# Altium PCB HW_Z-BAND_SMART_AMP_R1.PcbDoc (part 1 of 5)
Units mil, origin at the board's own origin, x right, y up, seen from the top; angles counter-clockwise.
Board outline 10200 x 3900 mil, 4 copper layers (Top Layer, Int1 (GND), Int2 (PWR), Bottom Layer), stack 60.134 mil thick; 398 components, 240 nets, 1098 pads, 2492 vias.
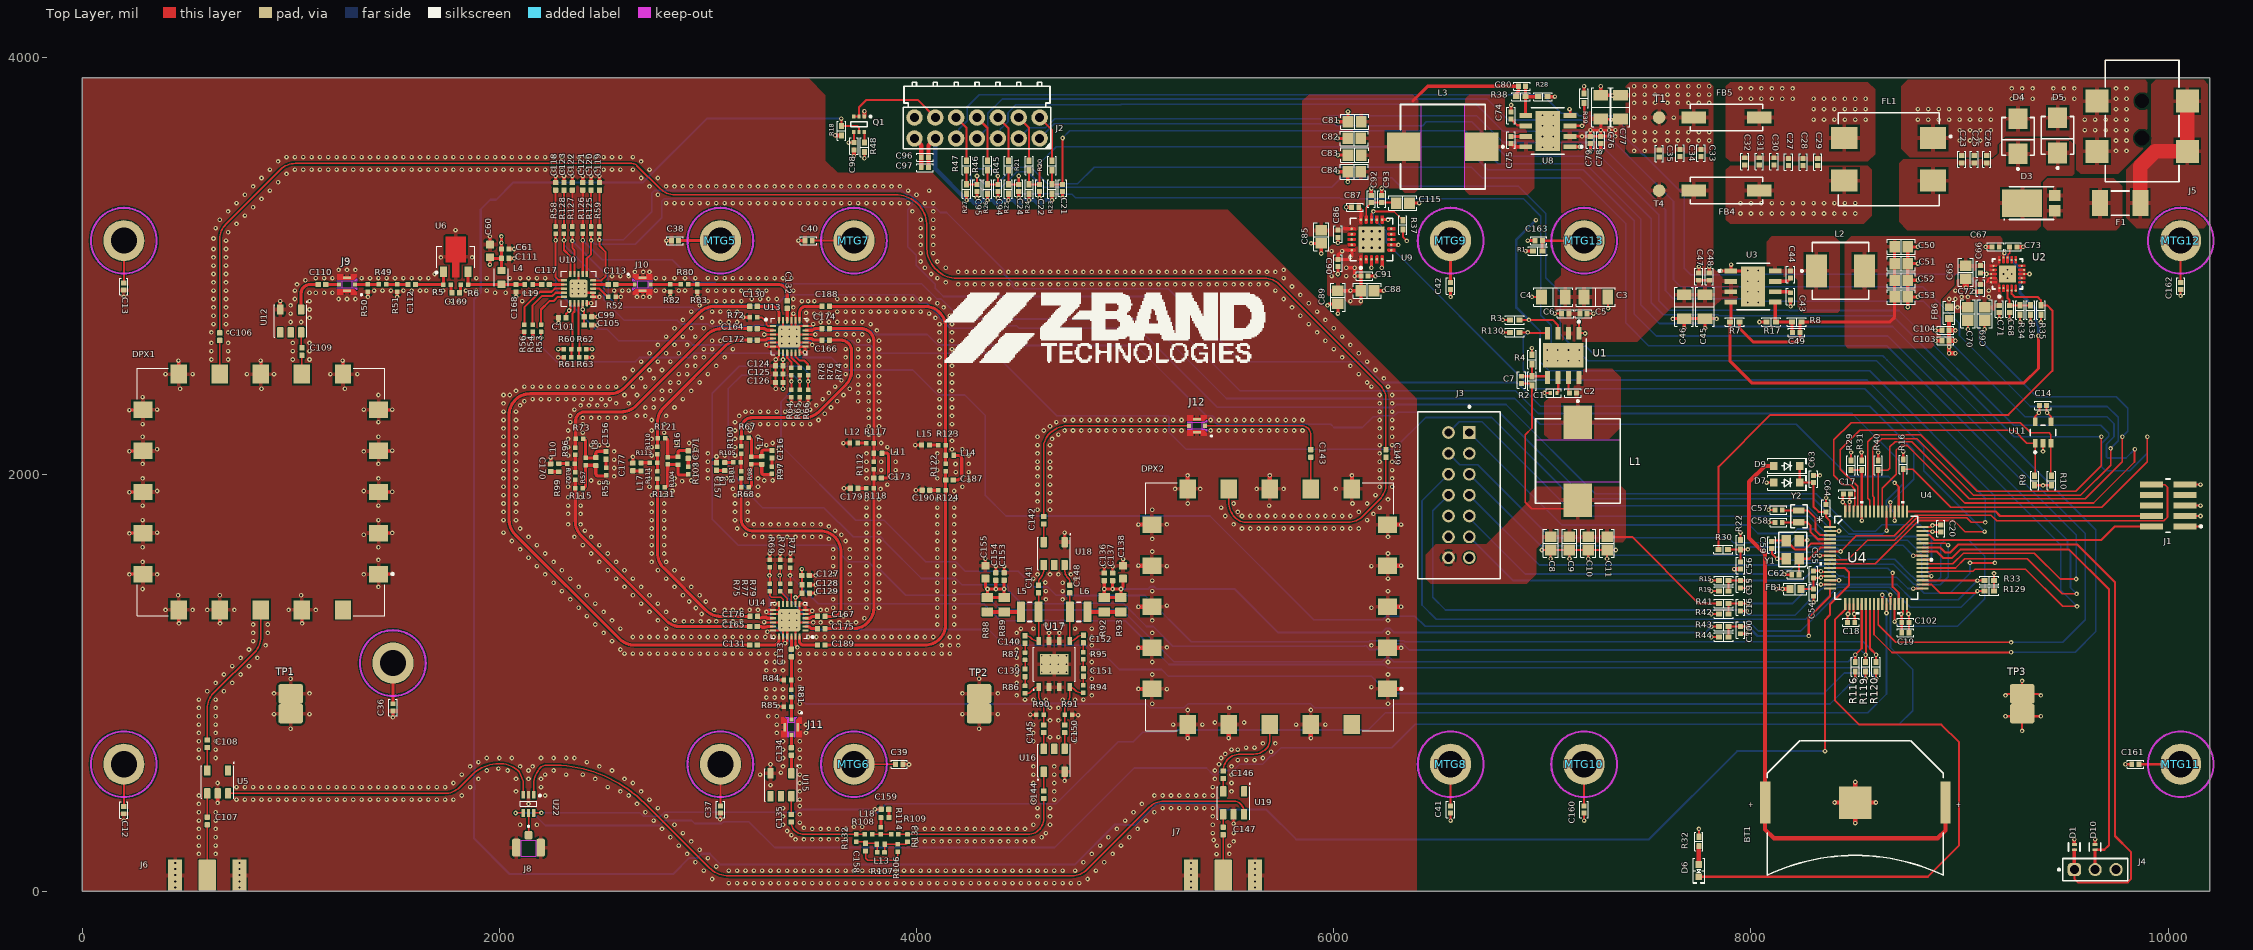
[diagram p0: Top Layer view]
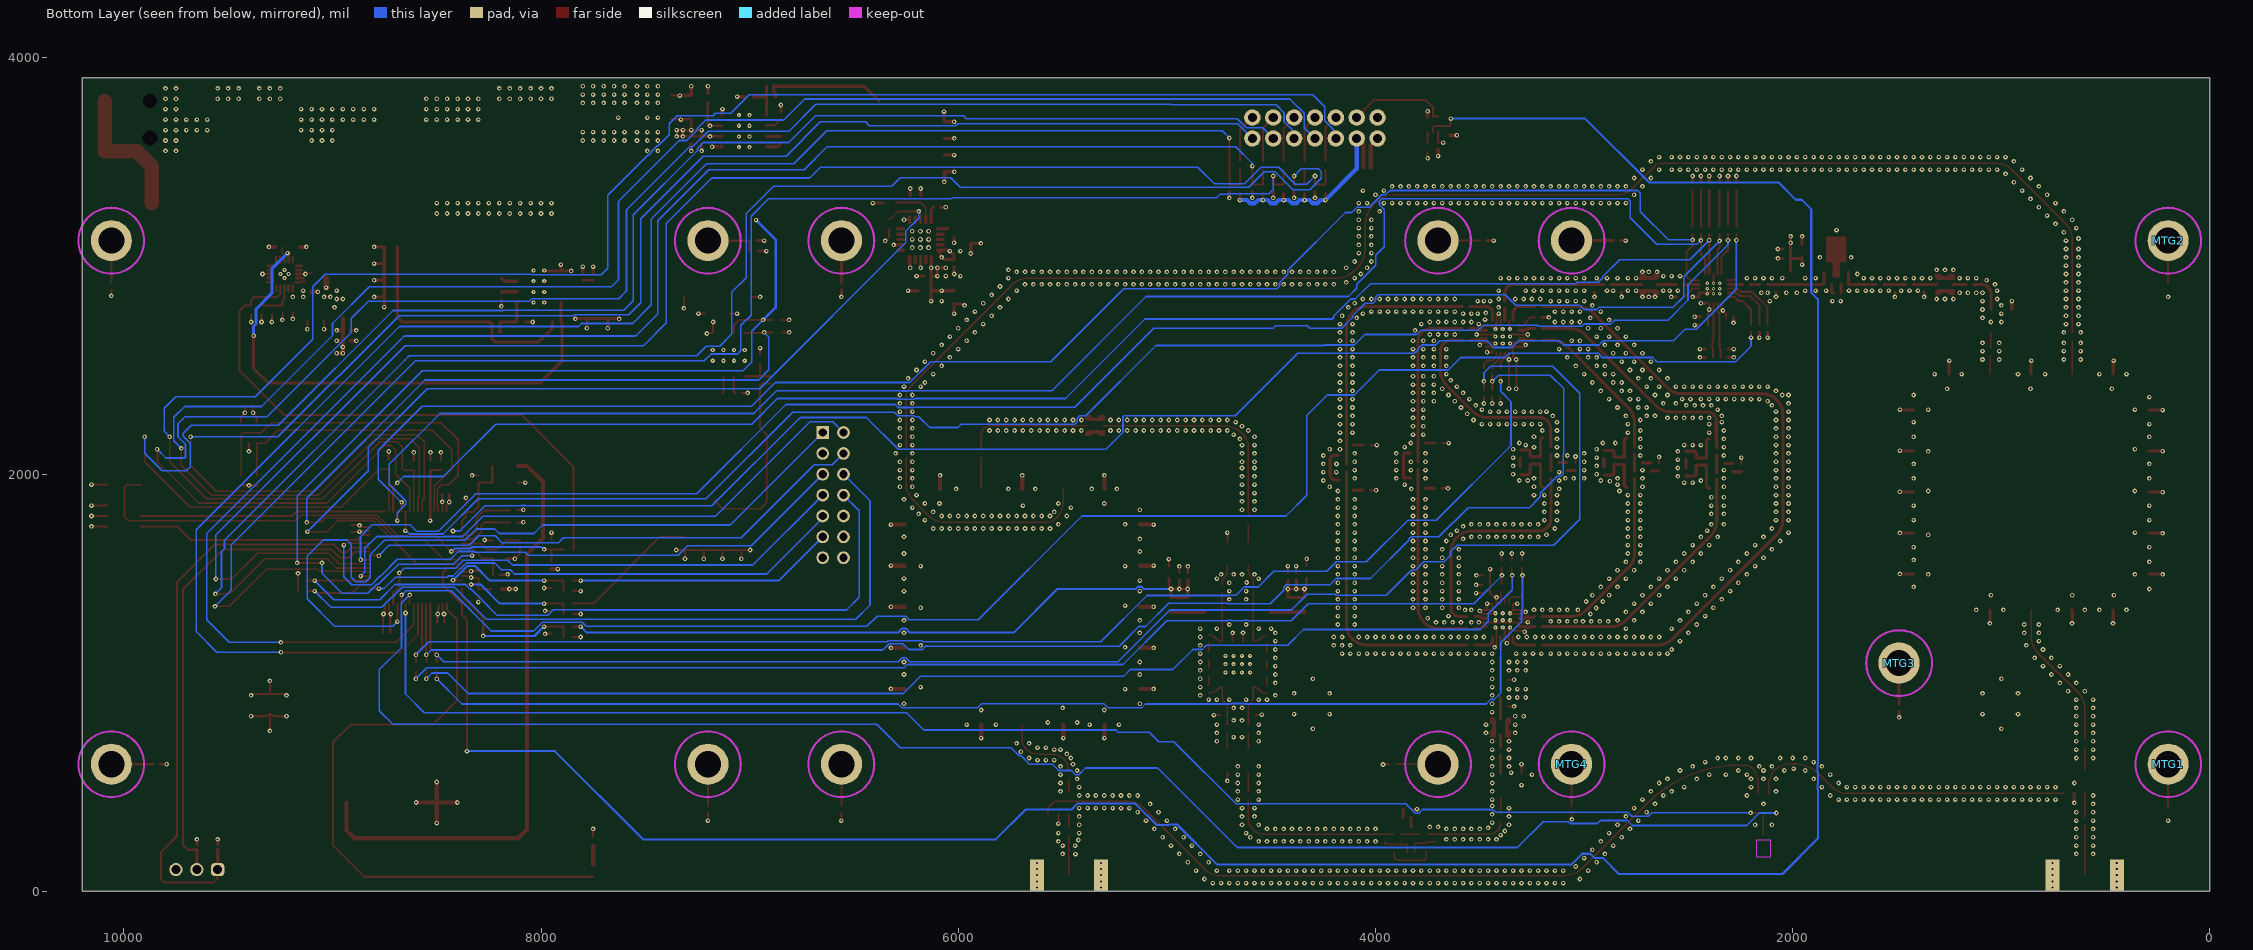
[diagram p1: Bottom Layer view, seen from below]
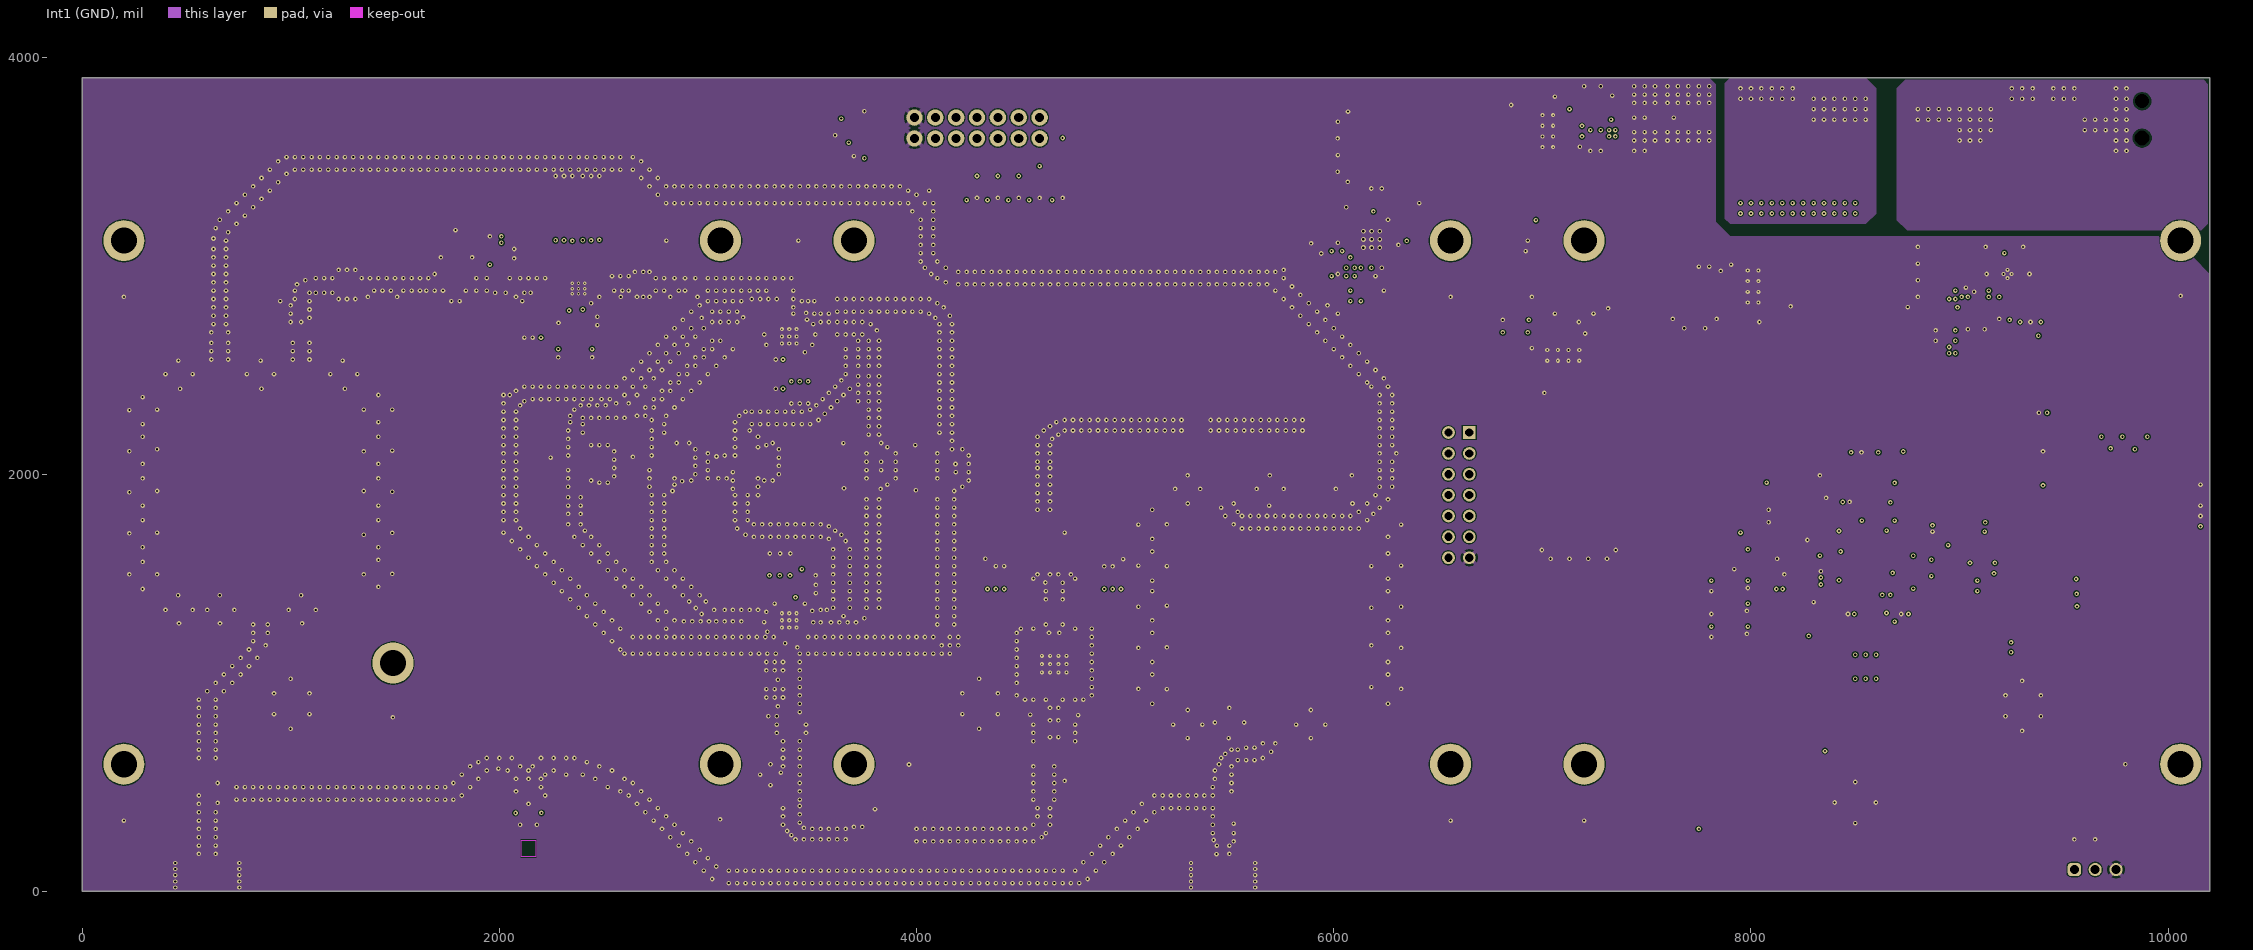
[diagram p2: Int1 (GND)]
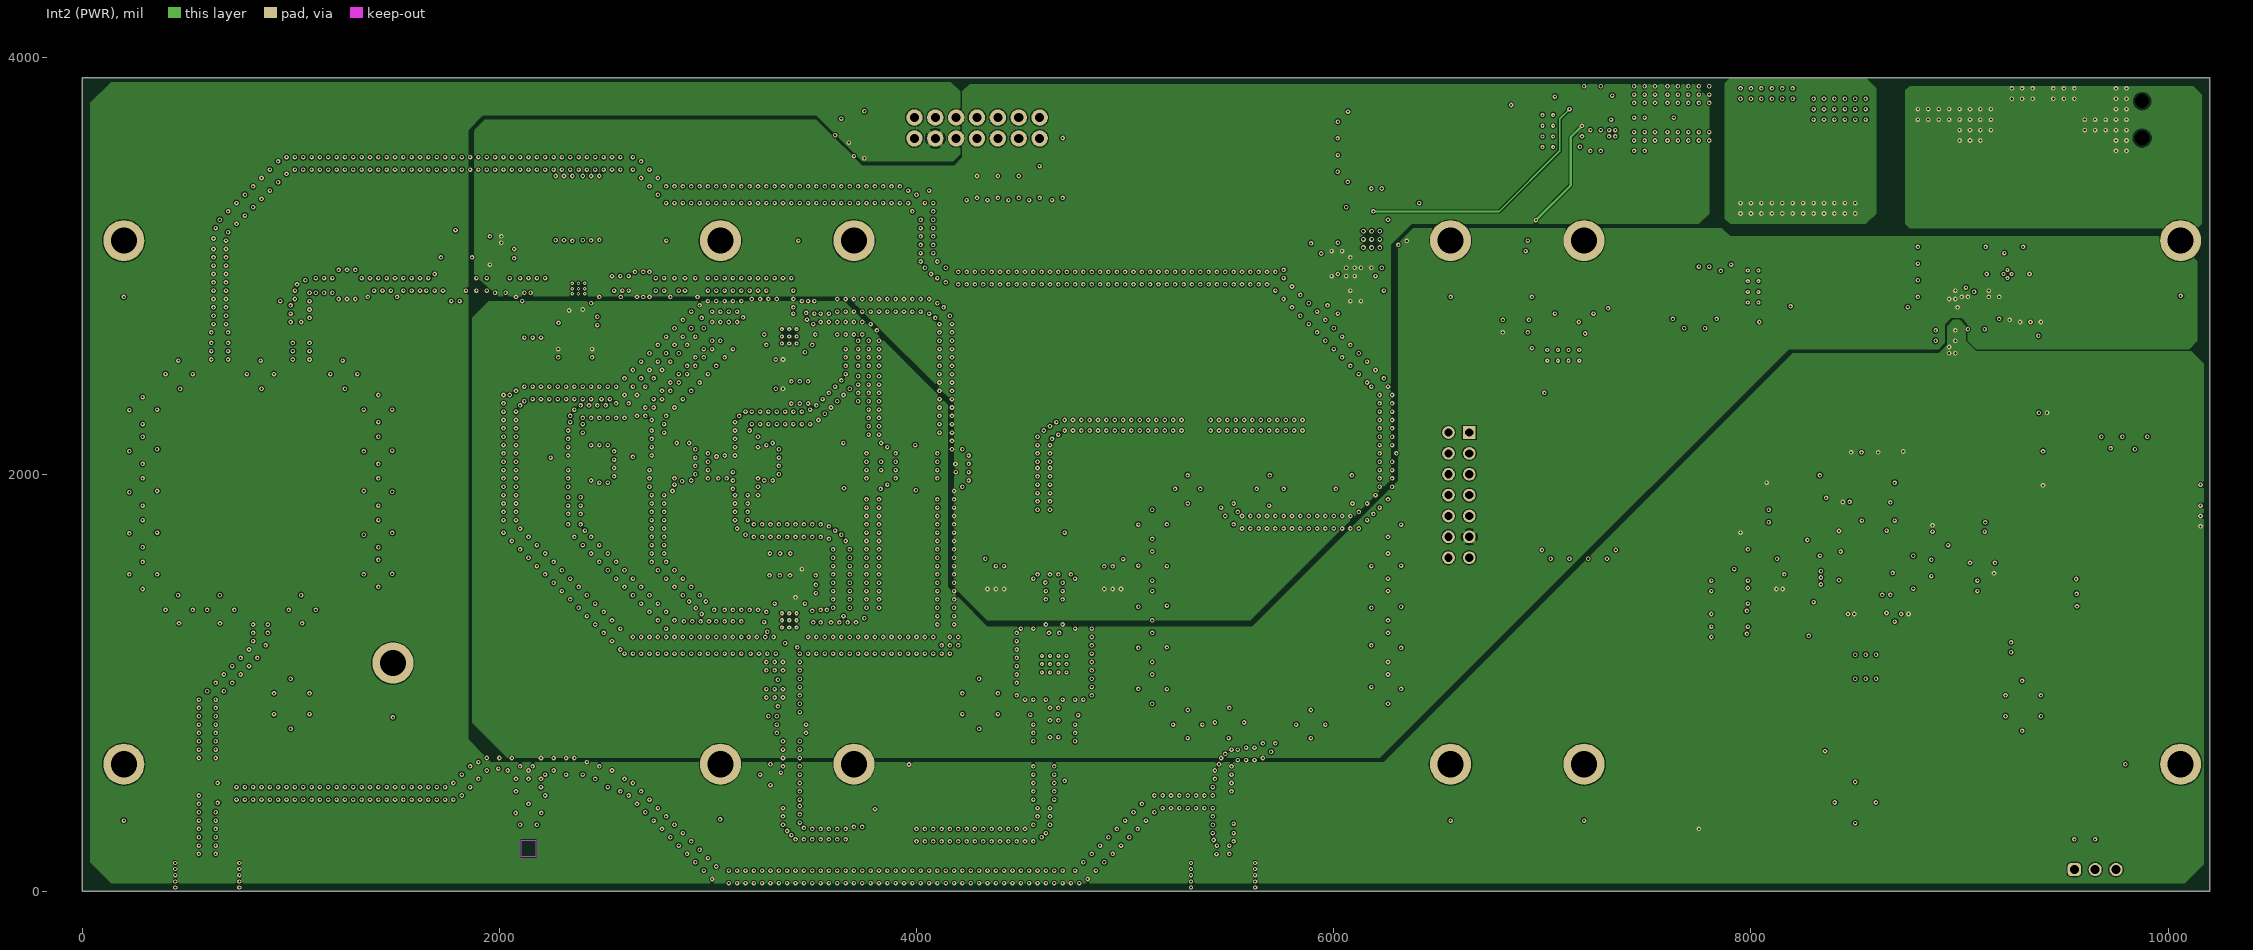
[diagram p3: Int2 (PWR)]

## Layer stack, top to bottom
Top Solder: solder mask 1, SM-001, Dk 3.5
Top Layer: signal copper 0.689
Dielectric 1: prepreg 16, PP-023, Dk 4.25
Int1 (GND): signal copper 1.378
Dielectric 2: core 24, Core-039, Dk 4.25
Int2 (PWR): signal copper 1.378
Dielectric 3: prepreg 16, PP-023, Dk 4.25
Bottom Layer: signal copper 0.689
Bottom Solder: solder mask 1, SM-001, Dk 3.5

## Board outline
0,0 10200,0 10200,3900 0,3900

## Design rules (kind name [scope] priority, off if disabled: settings)
Clearance Clearance_50ohm [InNetClass('RF_50_OHM')] p1: gap=5 ignorepadtopadclearanceinfootprint=TRUE except(10: Arc-Hole Track-Hole SMDPad-Hole THPad-Hole Via-Hole Fill-Hole Poly-Hole Region-Hole Text-Hole)
Clearance Clearance_75ohm [InNetClass('RF_75_OHM')] p2: gap=7 ignorepadtopadclearanceinfootprint=TRUE except(10: Arc-Hole Track-Hole SMDPad-Hole THPad-Hole Via-Hole Fill-Hole Poly-Hole Region-Hole Text-Hole)
Clearance [All] p3: gap=5 ignorepadtopadclearanceinfootprint=TRUE except(10: Arc-Hole Track-Hole SMDPad-Hole THPad-Hole Via-Hole Fill-Hole Poly-Hole Region-Hole Text-Hole)
DiffPairsRouting [All] p1: maxlimit=50.2 minlimit=5 mostfreqgap=11.47 toplayer_maxgap=5 toplayer_prefgap=5 toplayer_minwidth=10.52 toplayer_maxwidth=10.52 toplayer_prefwidth=10.52 bottomlayer_maxgap=5 bottomlayer_prefgap=5 bottomlayer_minwidth=10.52 bottomlayer_maxwidth=10.52 bottomlayer_prefwidth=10.52 impedanceprofiledriven=TRUE impedanceprofileid={E00AF46A-0802-41D7-B478-53C2EC012939} impedanceprofilevalue=90.000000 maxuncoupledlength=500
HoleSize [All] p1: absolutevalues=TRUE maxlimit=1000 minlimit=1 maxpercent=80.000 minpercent=20.000
MinimumAnnularRing [All] p1: minimumring=3.9
MinimumSolderMaskSliver [All] p1: minsoldermaskwidth=2
NetAntennae [All] p1: netantennaetolerance=20
PlaneClearance [All] p1: clearance=10
PlaneConnect [All] p1: pad.planeconnectstyle=Relief pad.reliefexpansion=20 pad.reliefentries=4 pad.reliefconductorwidth=20 pad.reliefairgap=10 via.planeconnectstyle=Direct via.reliefexpansion=20 via.reliefentries=4 via.reliefconductorwidth=10 via.reliefairgap=10
PolygonConnect [All] p1: thpad.connectstyle=Relief thpad.reliefconductorwidth=20 thpad.reliefentries=4 thpad.polygonreliefangle="45 Angle" thpad.airgapwidth=10 smdpad.connectstyle=Relief smdpad.reliefconductorwidth=20 smdpad.reliefentries=4 smdpad.polygonreliefangle="90 Angle" smdpad.airgapwidth=10 via.connectstyle=Direct via.reliefconductorwidth=10 via.reliefentries=4 via.polygonreliefangle="90 Angle" via.airgapwidth=10
RoutingVias [All] p1: holewidth=10 width=22 viastyle="Through Hole" minholewidth=8 minwidth=20 maxholewidth=80 maxwidth=80
SilkToSilkClearance [All] p1: silktosilkclearance=2
SilkToSolderMaskClearance [IsPad] p1: minsilkscreentomaskgap=2 clearancetoexposedcopper=TRUE
SolderMaskExpansion isVia [isvia] p1: expansion=4 istentingtop=TRUE
SolderMaskExpansion SolderMaskExpansion_default [All] p2: expansion=2 istentingtop=FALSE
SupplyNets "Schematic Supply Nets_14" [InNet('+3V3_D')] p1: voltage=0.000
SupplyNets "Schematic Supply Nets_13" [InNet('+3V3')] p2: voltage=0.000
SupplyNets "Schematic Supply Nets_12" [InNet('+9V')] p3: voltage=0.000
SupplyNets "Schematic Supply Nets_11" [InNet('GND_INT')] p4: voltage=0.000
SupplyNets "Schematic Supply Nets_10" [InNet('+8V')] p5: voltage=0.000
SupplyNets "Schematic Supply Nets_8" [InNet('GND_IN')] p6: voltage=0.000
SupplyNets "Schematic Supply Nets_7" [InNet('+5V')] p7: voltage=0.000
SupplyNets "Schematic Supply Nets_6" [InNet('+3V8')] p8: voltage=0.000
SupplyNets "Schematic Supply Nets_3" [InNet('MAIN_VDC_IN')] p9: voltage=0.000
SupplyNets "Schematic Supply Nets_2" [InNet('MAIN_VDC')] p10: voltage=0.000
SupplyNets "Schematic Supply Nets" [InNet('GND')] p11: voltage=0.000
UnRoutedNet [All] p1: checkbadconnections=TRUE
Width "Schematic Width Constraint_2" [InNet('NetC165_2')] p1: maxlimit=15 minlimit=10 preferedwidth=15 toplayer_minwidth=15 bottomlayer_minwidth=15 impedanceprofiledriven=TRUE impedanceprofileid={5CFBB01E-DCDC-40CB-8085-250B3334724C} impedanceprofilevalue=50.000000 minimp=50.000000 maximp=50.000000 favimp=50.000000
Width "Schematic Width Constraint_1" [InNet('NetC107_2')] p2: maxlimit=10 minlimit=6.81 preferedwidth=10 toplayer_maxwidth=6.81 toplayer_prefwidth=6.81 bottomlayer_maxwidth=6.81 bottomlayer_prefwidth=6.81 impedanceprofiledriven=TRUE impedanceprofileid={3DF160FF-8BF8-482F-8CC9-510EC21D1F20} impedanceprofilevalue=75.000000 minimp=50.000000 maximp=50.000000 favimp=50.000000
Width "Schematic Width Constraint" [InNet('NetC130_2')] p3: maxlimit=15 minlimit=10 preferedwidth=15 toplayer_minwidth=15 bottomlayer_minwidth=15 impedanceprofiledriven=TRUE impedanceprofileid={5CFBB01E-DCDC-40CB-8085-250B3334724C} impedanceprofilevalue=50.000000 minimp=50.000000 maximp=50.000000 favimp=50.000000
Width Width_50ohm_RF [InNetClass('RF_50_OHM')] p4: maxlimit=15 minlimit=8.25 preferedwidth=16.14 toplayer_minwidth=15 toplayer_prefwidth=15 bottomlayer_minwidth=15 bottomlayer_prefwidth=15 impedanceprofiledriven=TRUE impedanceprofileid={5CFBB01E-DCDC-40CB-8085-250B3334724C} impedanceprofilevalue=50.000000 minimp=50.000000 maximp=50.000000 favimp=50.000000
Width Width_75ohm_RF [InNetClass('RF_75_OHM')] p5: maxlimit=10 minlimit=6.81 preferedwidth=16.14 toplayer_maxwidth=6.81 toplayer_prefwidth=6.81 bottomlayer_maxwidth=6.81 bottomlayer_prefwidth=6.81 impedanceprofiledriven=TRUE impedanceprofileid={3DF160FF-8BF8-482F-8CC9-510EC21D1F20} impedanceprofilevalue=75.000000 minimp=50.000000 maximp=50.000000 favimp=50.000000
Width [All] p6: maxlimit=100 minlimit=6 preferedwidth=10 minimp=50.000000 maximp=50.000000 favimp=50.000000
21 further rules are at their usual default settings.

## Classes and differential pairs
net class RF_50_OHM: NetC110_1 NetC110_2 NetC112_1 NetC112_2 NetC113_1 NetC113_2 NetC116_1 NetC116_2 NetC117_1 NetC117_2 NetC130_1 NetC130_2 NetC131_1 NetC132_1 NetC132_2 NetC133_1 NetC133_2 NetC134_1 NetC134_2 NetC156_1 NetC156_2 NetC164_1 NetC165_2 NetC166_1 NetC167_2 NetC168_2 NetC169_1 NetC169_2 NetC171_1 NetC172_1 NetC173_1 NetC173_2 NetC174_1 NetC174_2 NetC175_2 NetC176_1 NetC176_2 NetC187_1 NetC187_2 NetC188_1 NetC188_2 NetC189_2 NetJ9_C NetJ10_A NetJ11_C NetL7_2 NetL8_2 NetL16_2 NetR96_2 NetR100_2 NetR110_2
net class RF_75_OHM: bypass_lane NetC106_1 NetC107_1 NetC107_2 NetC108_1 NetC108_2 NetC109_1 NetC109_2 NetC135_1 NetC135_2 NetC140_2 NetC141_1 NetC142_1 NetC142_2 NetC143_1 NetC143_2 NetC144_1 NetC144_2 NetC145_1 NetC145_2 NetC146_1 NetC146_2 NetC147_1 NetC147_2 NetC148_1 NetC148_2 NetC149_1 NetC150_1 NetC150_2 NetC158_1 NetC158_2 NetJ8_1 NetL13_2 NetR108_2 NetU5_1 NetU19_1
component class 10_RF_2: C116 C156 C157 C164 C165 C166 C167 C170 C171 C172 C173 C174 C175 C176 C177 C179 C187 C188 C189 C190 J8 L7 L8 L9 L10 L11 L12 L14 L15 L16 L17 R55 R57 R67 R68 R73 R96 R97 R98 R99 R100 R101 R102 R103 R104 R105 R110 R111 R112 R113 R115 R117 R118 R121 R122 R123 R124 R131 U22
component class 10_RF_1: C60 C61 C99 C101 C105 C106 C107 C108 C109 C110 C111 C112 C113 C117 C118 C119 C120 C121 C122 C123 C124 C125 C126 C127 C128 C129 C130 C131 C132 C133 C134 C135 C136 C137 C138 C139 C140 C141 C142 C143 C144 C145 C146 C147 C148 C149 C150 C151 C152 C153 C154 C155 C158 C159 C168 C169 DPX1 DPX2 J6 J7 J9 J10 J11 J12 L4 L5 L6 L13 L18 L19 R5 R6 R49 R50 R51 R52 R53 R54 R56 R58 R59 R60 R61 R62 R63 R64 R65 R66 R69 R70 R71 R72 R74 R75 R76 R77 R78 R79 R80 R81 R82 R83 R84 R85 R86 R87 R88 R89 R90 R91 R92 R93 R94 R95 R106 R107 R108 R109 R114 R125 R126 R127 R128 R132 R133 U5 U6 U10 U12 U13 U14 U15 U16 U17 U18 U19
component class 04_8V_GENERATION: C74 C75 C76 C77 C78 C79 C80 C81 C82 C83 C84 C85 C86 C87 C88 C89 C90 C91 C92 C93 C115 L3 R28 R37 R38 R39 U8 U9
component class 06_MCU: BT1 C15 C16 C17 C18 C19 C20 C54 C55 C56 C57 C58 C59 C62 C63 C64 C100 C102 D6 D7 D9 FB1 J1 R15 R19 R22 R29 R30 R31 R32 R41 R42 R43 R44 R116 R119 R120 U4 Y1 Y2
component class 09_USB: D1 D10 J4
component class 08_EPROM_UNIQUE_SERIAL: C14 R9 R10 U11
component class 07_CONNECTORS: C12 C13 C36 C37 C38 C39 C40 C41 C42 C160 C161 C162 C163 J3 MTG1 MTG2 MTG3 MTG4 MTG5 MTG6 MTG7 MTG8 MTG9 MTG10 MTG11 MTG12 MTG13 R1 R33 R129
component class 05_3V3_GENERATION: C43 C44 C45 C46 C47 C48 C49 C50 C51 C52 C53 C65 C66 C67 C68 C69 C70 C71 C72 C73 C103 C104 FB6 L2 R7 R8 R17 R34 R35 R36 U2 U3
component class 11_SCREEN: C21 C22 C24 C94 C95 C96 C97 C98 J2 Q1 R16 R18 R20 R21 R23 R24 R25 R26 R27 R40 R45 R46 R47 R48
component class 03_POWER: C1 C2 C3 C4 C5 C6 C7 C8 C9 C10 C11 C23 C25 C26 C27 C28 C29 C30 C31 C32 C33 C34 C35 D3 D4 D5 F1 FB4 FB5 FL1 J5 L1 R2 R3 R4 R130 T1 T4 TP1 TP2 TP3 U1

## Components (designator, comment, footprint, x,y, rotation, side; value= is the part's Value field where it differs from the comment)
BT1 "3034" FP-3034-MFG 8500,400 r180 top locked
C1 "1 µF" "MURATA GRM155 0402_1005" 7054.25,2390 r180 top
C2 "0.1 µF" "CAP 0402_1005" 7147.32,2390 r180 top
C3 "10 µF" "CAP 1206_3216 - 0.8MM" 7257.09,2850 r180 top
C4 "10 µF" "CAP 1206_3216 - 0.8MM" 7052.91,2850 r0 top
C5 "0.1 µF" "CAP 0402_1005" 7197.32,2770 r180 top
C6 "0.1 µF" "CAP 0402_1005" 7110,2770 r0 top
C7 "1000 pF" "CAP 0402_1005" 6900,2452.68 r270 top
C8 "22 µF" "CAP 0805_2012" 7040,1668.5 r90 top
C9 "22 µF" "CAP 0805_2012" 7130,1668.5 r90 top
C10 "22 µF" "CAP 0805_2012" 7220,1668.5 r90 top
C11 "22 µF" "CAP 0805_2012" 7310,1668.5 r90 top
C12 "1000 pF" "CAP 0402_1005" 200,390 r90 top
C13 "1000 pF" "CAP 0402_1005" 200,2900 r90 top
C14 "0.1 µF" "CAP 0402_1005" 9400,2330 r0 top
C15 "0.1 µF" "CAP 0402_1005" 7950,1472.68 r90 top
C16 "0.1 µF" "CAP 0402_1005" 7950,1362.68 r90 top
C17 "1 µF" "CAP 0402_1005" 8460,1905 r0 top
C18 "0.1 µF" "CAP 0402_1005" 8480,1290 r0 top
C19 "0.1 µF" "CAP 0402_1005" 8740,1240 r0 top
C20 "0.1 µF" "CAP 0402_1005" 8910,1740 r90 top
C21 "0.1 µF" "CAP 0402_1005" 4700,3372.68 r90 top
C22 "0.1 µF" "CAP 0402_1005" 4590,3372.68 r90 top
C23 "0.1 µF" "CAP 0402_1005" 9010,3510 r270 top
C24 "0.1 µF" "CAP 0402_1005" 4490,3372.68 r90 top
C25 "1000 pF" "CAP 0402_1005" 9070,3510 r270 top
C26 "100 pF" "CAP 0402_1005" 9130,3510 r270 top
C27 "0.1 µF" "CAP 0402_1005" 8180,3497.32 r270 top
C28 "1000 pF" "CAP 0402_1005" 8250,3497.32 r270 top
C29 "100 pF" "CAP 0402_1005" 8320,3497.32 r270 top
C30 "0.1 µF" "CAP 0402_1005" 8110,3500 r270 top
C31 "1000 pF" "CAP 0402_1005" 8040,3500 r270 top
C32 "100 pF" "CAP 0402_1005" 7970,3500 r270 top
C33 "0.1 µF" "CAP 0402_1005" 7760,3540 r270 top
C34 "1000 pF" "CAP 0402_1005" 7660,3540 r270 top
C35 "100 pF" "CAP 0402_1005" 7560,3537.32 r270 top
C36 "1000 pF" "CAP 0402_1005" 1490,882.68 r90 top
C37 "1000 pF" "CAP 0402_1005" 3060,392.68 r90 top
C38 "1000 pF" "CAP 0402_1005" 2842.68,3120 r0 top
C39 "1000 pF" "CAP 0402_1005" 3917.32,610 r180 top
C40 "1000 pF" "CAP 0402_1005" 3482.68,3120 r0 top
C41 "1000 pF" "CAP 0402_1005" 6560,392.68 r90 top
C42 "1000 pF" "CAP 0402_1005" 6560,2902.68 r90 top
C43 "1 µF" "CAP 0402_1005" 8190,2852.68 r270 top
C44 "0.1 µF" "CAP 0402_1005" 8190,2957.32 r270 top
C45 "10 µF" "CAP 1206_3216 - 0.8MM" 7780,2802.91 r90 top
C46 "10 µF" "CAP 1206_3216 - 0.8MM" 7680,2802.91 r90 top
C47 "0.1 µF" "CAP 0402_1005" 7750,2947.32 r270 top
C48 "0.1 µF" "CAP 0402_1005" 7800,2947.32 r270 top
C49 "1000 pF" "CAP 0402_1005" 8217.32,2680 r0 top
C50 "22 µF" "CAP 0805_2012" 8720,3090 r180 top
C51 "22 µF" "CAP 0805_2012" 8720,3010 r180 top
C52 "22 µF" "CAP 0805_2012" 8720,2930 r180 top
C53 "22 µF" "CAP 0805_2012" 8720,2850 r180 top
C54 "0.1 µF" "CAP 0402_1005" 8300,1432.68 r90 top
C55 "10000 pF" "CAP 0402_1005" 8300,1520 r270 top
C56 "0.1 µF" "CAP 0402_1005" 7950,1562.68 r90 top
C57 "15 pF" "CAP 0402_1005" 8132.68,1828.54 r180 top
C58 "15 pF" "CAP 0402_1005" 8132.68,1768.54 r180 top
C59 "15 pF" "CAP 0402_1005" 8100,1661.22 r270 top
C60 "C 0603 16V X7R - 4.7uF" CAP_0603_N 1955,3070.51 r270 top value=4.7uF
C61 "C 0402 50V X7R - 100nF" CAP_0402_N 2028.11,3080 r180 top value=100nF
C62 "15 pF" "CAP 0402_1005" 8212.68,1518.54 r180 top
C63 "0.1 µF" "CAP 0402_1005" 8300,1977.32 r270 top
C64 "0.1 µF" "CAP 0402_1005" 8360,1837.32 r270 top
C65 "22 µF" "CAP 0805_2012" 9030,2968.5 r90 top
C66 "0.1 µF" "CAP 0402_1005" 9100,2982.68 r90 top
C67 "1000 pF" "CAP 0402_1005" 9172.68,3090 r0 top
C68 "10000 pF" "CAP 0402_1005" 9240,2792.68 r270 top
C69 "22 µF" "CAP 0805_2012" 9120,2768.5 r90 top
C70 "22 µF" "CAP 0805_2012" 9040,2768.5 r90 top
C71 "1 µF" "CAP 0402_1005" 9190,2792.68 r270 top
C72 "0.1 µF" "CAP 0402_1005" 9100,2892.68 r90 top
C73 "0.1 µF" "CAP 0402_1005" 9257.32,3090 r180 top
C74 "1 µF" "CAP 0402_1005" 6850,3720 r90 top
C75 "0.1 µF" "CAP 0402_1005" 6850,3602.68 r90 top
C76 "10 µF" "CAP 1206_3216 - 0.8MM" 7280,3760 r270 top
C77 "10 µF" "CAP 1206_3216 - 0.8MM" 7375,3760 r270 top
C78 "0.1 µF" "CAP 0402_1005" 7280,3602.68 r90 top
C79 "0.1 µF" "CAP 0402_1005" 7230,3602.68 r90 top
C80 "1000 pF" "CAP 0402_1005" 6902.68,3860 r180 top
C81 "22 µF" "CAP 0805_2012" 6100,3690 r0 top
C82 "22 µF" "CAP 0805_2012" 6098.5,3610 r0 top
C83 "22 µF" "CAP 0805_2012" 6100,3530 r0 top
C84 "22 µF" "CAP 0805_2012" 6098.5,3450 r0 top
C85 "22 µF" "CAP 0805_2012" 5940,3138.5 r90 top
C86 "0.1 µF" "CAP 0402_1005" 6020,3152.68 r90 top
C87 "1000 pF" "CAP 0402_1005" 6102.68,3280 r0 top
C88 "22 µF" "CAP 0805_2012" 6161.5,2880 r180 top
C89 "22 µF" "CAP 0805_2012" 6020,2848.5 r90 top
C90 "1 µF" "CAP 0402_1005" 6020,3012.68 r270 top
C91 "0.1 µF" "CAP 0402_1005" 6147.32,2950 r180 top
C92 "0.1 µF" "CAP 0402_1005" 6180,3320 r270 top
C93 "10000 pF" "CAP 0402_1005" 6230,3320 r270 top
C94 "0.1 µF" "CAP 0402_1005" 4390,3372.68 r90 top
C95 "0.1 µF" "CAP 0402_1005" 4290,3372.68 r90 top
C96 "1 µF" "CAP 0402_1005" 4040,3520 r180 top
C97 "0.1 µF" "CAP 0402_1005" 4040,3470 r0 top
C98 "0.1 µF" "CAP 0402_1005" 3700,3572.68 r90 top
C99 "C 0402 50V NP0 - 100pF" CAP_0402_N 2425,2755 r180 top value=100pF
C100 "0.1 µF" "CAP 0402_1005" 7950,1252.68 r90 top
C101 "C 0402 50V X7R - 100nF" CAP_0402_N 2301.89,2750 r0 top value=100nF
C102 "10000 pF" "CAP 0402_1005" 8740,1290 r0 top
C103 "0.1 µF" "CAP 0402_1005" 8932.68,2640 r0 top
C104 "10000 pF" "CAP 0402_1005" 8932.68,2690 r0 top
C105 "C 0402 50V X7R - 100nF" CAP_0402_N 2425,2715 r180 top value=100nF
C106 "C 0402 50V X7R - 10nF" CAP_0402_N 660,2660 r90 top value=10nF
C107 "C 0402 50V X7R - 10nF" CAP_0402_N 600,338.11 r90 top value=10nF
C108 "C 0402 50V X7R - 10nF" CAP_0402_N 600,708.11 r90 top value=10nF
C109 "C 0402 50V X7R - 10nF" CAP_0402_N 1053.7,2588.11 r90 top value=10nF
C110 "C 0402 50V X7R - 10nF" CAP_0402_N 1150,2910 r0 top value=10nF
C111 "C 0402 50V X7R - 1nF" CAP_0402_N 2028.11,3035 r180 top value=1nF
C112 "C 0402 50V X7R - 1nF" CAP_0402_N 1580,2910 r0 top value=1nF
C113 "C 0402 50V X7R - 10nF" CAP_0402_N 2540,2910 r0 top value=10nF
C115 "1 µF" "CAP 0805_2012" 6331.5,3300 r180 top
C116 "C 0402 50V X7R - 3.3nF" CAP_0402_N 3307.09,2096.06 r270 top value=3.3nF
C117 "C 0402 50V X7R - 1nF" CAP_0402_N 2221.89,2910 r0 top value=1nF
C118 "C 0402 50V NP0 - 100pF" CAP_0402_N 2270,3380 r270 top value=100pF
C119 "C 0402 50V NP0 - 100pF" CAP_0402_N 2480,3380 r270 top value=100pF
C120 "C 0402 50V NP0 - 100pF" CAP_0402_N 2440,3380 r270 top value=100pF
C121 "C 0402 50V NP0 - 100pF" CAP_0402_N 2400,3380 r270 top value=100pF
C122 "C 0402 50V NP0 - 100pF" CAP_0402_N 2350,3380 r270 top value=100pF
C123 "C 0402 50V NP0 - 100pF" CAP_0402_N 2310,3380 r270 top value=100pF
C124 "C 0402 50V NP0 - 100pF" CAP_0402_N 3341.89,2520.63 r0 top value=100pF
C125 "C 0402 50V X7R - 100nF" CAP_0402_N 3341.89,2480.63 r0 top value=100nF
C126 "C 0402 50V X7R - 100nF" CAP_0402_N 3341.89,2440 r0 top value=100nF
C127 "C 0402 50V X7R - 100nF" CAP_0402_N 3468.11,1515 r180 top value=100nF
C128 "C 0402 50V X7R - 100nF" CAP_0402_N 3469.37,1470.16 r180 top value=100nF
C129 "C 0402 50V NP0 - 100pF" CAP_0402_N 3469.37,1430.16 r180 top value=100pF
C130 "C 0402 50V X7R - 10nF" CAP_0402_N 3218.5,2805.12 r180 top value=10nF
C131 "C 0402 50V X7R - 10nF" CAP_0402_N 3218.5,1181.1 r180 top value=10nF
C132 "C 0402 50V X7R - 10nF" CAP_0402_N 3380.16,2813.39 r270 top value=10nF
C133 "C 0402 50V X7R - 10nF" CAP_0402_N 3399.84,1143.31 r270 top value=10nF
C134 "C 0402 50V X7R - 10nF" CAP_0402_N 3399.84,671.26 r270 top value=10nF
C135 "C 0402 50V X7R - 10nF" CAP_0402_N 3399.84,351.26 r270 top value=10nF
C136 "C 0402 50V X7R - 100nF" CAP_0402_N 4900,1508.11 r270 top value=100nF
C137 "C 0402 50V X7R - 10nF" CAP_0402_N 4940,1508.11 r90 top value=10nF
C138 "C 0603 16V X7R - 4.7uF" CAP_0603_N 4990,1530.51 r90 top value=4.7uF
C139 "C 0402 50V X7R - 10nF" CAP_0402_N 4520,1048.11 r90 top value=10nF
C140 "C 0402 50V X7R - 10nF" CAP_0402_N 4520,1208.11 r90 top value=10nF
C141 "C 0402 50V X7R - 10nF" CAP_0402_N 4585,1450 r270 top value=10nF
C142 "C 0402 50V X7R - 10nF" CAP_0402_N 4610,1780 r270 top value=10nF
C143 "C 0402 50V X7R - 10nF" CAP_0402_N 5890,2100 r90 top value=10nF
C144 "C 0402 50V X7R - 10nF" CAP_0402_N 4610,463.58 r90 top value=10nF
C145 "C 0402 50V X7R - 10nF" CAP_0402_N 4610,780 r90 top value=10nF
C146 "C 0402 50V X7R - 10nF" CAP_0402_N 5470,560 r90 top value=10nF
C147 "C 0402 50V X7R - 10nF" CAP_0402_N 5470,290 r90 top value=10nF
C148 "C 0402 50V X7R - 10nF" CAP_0402_N 4735,1450 r270 top value=10nF
C149 "C 0402 50V X7R - 10nF" CAP_0402_N 6250,2100 r90 top value=10nF
C150 "C 0402 50V X7R - 10nF" CAP_0402_N 4710,780 r90 top value=10nF
C151 "C 0402 50V X7R - 10nF" CAP_0402_N 4800,1050 r90 top value=10nF
C152 "C 0402 50V X7R - 10nF" CAP_0402_N 4800,1210 r90 top value=10nF
C153 "C 0402 50V X7R - 100nF" CAP_0402_N 4420,1510 r90 top value=100nF
C154 "C 0402 50V X7R - 10nF" CAP_0402_N 4380,1510 r270 top value=10nF
C155 "C 0603 16V X7R - 4.7uF" CAP_0603_N 4330,1530.51 r90 top value=4.7uF
C156 "C 0402 50V X7R - 3.3nF" CAP_0402_N 2511.81,2090.55 r270 top value=3.3nF
C157 "C 0402 50V C0G/NP0 - 5pF" CAP_0402_N 3041.34,2037.01 r270 top value=5pF
C158 "C 0402 50V X7R - 3.3nF" CAP_0402_N 3755.91,212.6 r270 top value=3.3nF
C159 "C 0402 50V C0G/NP0 - 5pF" CAP_0402_N 3848.43,393.7 r0 top value=5pF
C160 "1000 pF" "CAP 0402_1005" 7200,392.68 r90 top
C161 "1000 pF" "CAP 0402_1005" 9842.68,610 r0 top
C162 "1000 pF" "CAP 0402_1005" 10060,2902.68 r90 top
C163 "1000 pF" "CAP 0402_1005" 6982.68,3120 r0 top
C164 "C 0402 50V X7R - 10nF" CAP_0402_N 3218.5,2698.03 r180 top value=10nF
C165 "C 0402 50V X7R - 10nF" CAP_0402_N 3218.5,1269.68 r0 top value=10nF
C166 "C 0402 50V X7R - 10nF" CAP_0402_N 3564.57,2642.91 r0 top
C167 "C 0402 50V X7R - 10nF" CAP_0402_N 3543.31,1318.9 r180 top value=10nF
C168 "C 0402 50V C0G/NP0 - 0.5pF" CAP_0402_N 2080,2891.89 r90 top value=0.5pF
C169 "C 0402 50V C0G/NP0 - 20pF" CAP_0402_N 1791.34,2870.08 r0 top value=20pF
C170 "C 0402 50V C0G/NP0 - 5pF" CAP_0402_N 2246.06,2031.5 r270 top value=5pF
C171 "C 0402 50V X7R - 3.3nF" CAP_0402_N 2905.83,2094.41 r270 top value=3.3nF
C172 "C 0402 50V X7R - 10nF" CAP_0402_N 3218.5,2642.91 r180 top value=10nF
C173 "C 0402 50V X7R - 3.3nF" CAP_0402_N 3813.39,1982.28 r0 top value=3.3nF
C174 "C 0402 50V X7R - 10nF" CAP_0402_N 3564.57,2698.03 r0 top value=10nF
C175 "C 0402 50V X7R - 10nF" CAP_0402_N 3543.31,1259.84 r180 top value=10nF
C176 "C 0402 50V X7R - 10nF" CAP_0402_N 3220.08,1318.9 r0 top value=10nF
C177 "C 0402 50V C0G/NP0 - 5pF" CAP_0402_N 2640.08,2035.35 r270 top value=5pF
C179 "C 0402 50V X7R - 3.3nF" CAP_0402_N 3700.79,1933.07 r0 top value=3.3nF
C187 "C 0402 50V X7R - 3.3nF" CAP_0402_N 4157.8,1972.6 r0 top value=3.3nF
C188 "C 0402 50V X7R - 10nF" CAP_0402_N 3564.57,2805.12 r0 top value=10nF
C189 "C 0402 50V X7R - 10nF" CAP_0402_N 3543.31,1181.1 r180 top value=10nF
C190 "C 0402 50V X7R - 3.3nF" CAP_0402_N 4045.2,1923.39 r0 top value=3.3nF
D1 "RF2945-000" FP-SESD0402-MFG 9550,212.8 r270 top value=0.1pF
D3 "SDT8A60VP5-13" "DIODES INC SDT10A45P5" 9344.09,3300 r0 top
D4 "SMBJ14A" FP-SMBJ-MFG 9280,3620 r90 top
D5 "SMBJ14A" FP-SMBJ-MFG 9470,3624.65 r90 top
D6 "Green" "LED 0603_1608 GREEN" 7750,100 r270 top
D7 "MBR0520LT1G" SOD-123 8172.01,1960 r0 top
D9 "MBR0520LT1G" SOD-123 8172.01,2040 r0 top
D10 "RF2945-000" FP-SESD0402-MFG 9650,212.8 r270 top value=0.1pF
DPX1 "DPLX-4254A0+" NU-1620 856.85,1914.96 r180 top
DPX2 "DPLX-4254A0+" NU-1620 5693.15,1365.04 r180 top
F1 "0451003.MRL" FP-0451-MFG 9770,3300 r180 top value=0.0227Ω
FB1 "100 Ohms @ 100 MHz" "FER 0603_1608" 8213.43,1450 r180 top
FB4 "7427931" WE-PBF_8530_L9.5W3H3.1 7882.52,3360 r180 top
FB5 "7427931" WE-PBF_8530_L9.5W3H3.1 7882.52,3710 r180 top
FB6 "100 Ohms @ 100 MHz" "FER 0603_1608" 8950,2773.43 r90 top
FL1 "ACM1211-701-2PL-TL01" TDK-ACM1211-4_V 8660,3510 r180 top
J1 "FTSH-105-01-F-DV-K-P-TR" FP-FTSH-105-01-F-DV-K-P-T-MFG 10000,1850 r90 top
J2 "M20-9740746" "HARWIN M20-9740745" 4290,3660 r180 top locked
J3 "90130-1214" FP-90130-1214-MFG 6600,1900 r270 top
J4 "61300311121" "WURTH WE-PHD 61300311121" 9650,105 r0 top
J5 "PJ-002BH-SMT-TR" "CUI PJ-002BH-SMT-TR" 9875,3700 r270 top locked
J6 "DOSIN-803-0130" 1211-66137 600,78 r180 top locked
J7 "DOSIN-803-0130" 1211-66137 5470,78 r180 top locked
J8 "2337019-1" 2337019-1 2140,210 r180 top
J9 "MS-156C3" HIROSE_MS-156C3 1270,2910 r180 top
J10 "MS-156C3" HIROSE_MS-156C3 2687.01,2910 r0 top
J11 "MS-156C3" HIROSE_MS-156C3 3399.84,787.4 r270 top
J12 "MS-156C3" HIROSE_MS-156C3 5344.49,2232.68 r180 top
L1 "74437368100" WE-LHMI_1040 57170,-47937.01 r270 top
L2 "784373460068" WE-LHCA_7030 8428.86,2975 r90 top
L3 "74437368100" WE-LHMI_1040 -43477.01,-46430 r180 top
L4 "L 0805 800mA - 1uH" IND_0806_LQH2MPN820MGRL 2010,2943.46 r90 top value=1uH
L5 "L 1008 400mA - 820nH" IND_1008_N 4542.68,1340 r180 top value=820nH
L6 "L 1008 400mA - 820nH" IND_1008_N 4777.32,1340 r180 top value=820nH
L7 "L 0402 500mA - 9.1nH" IND_0402_N 3257.87,2066.54 r270 top value=9.1nH
L8 "L 0402 500mA - 9.1nH" IND_0402_N 2462.6,2061.02 r270 top value=9.1nH
L9 "L 0402 650mA - 5.6nH" IND_0402_N 3080.71,2037.01 r90 top value=5.6nH
L10 "L 0402 650mA - 5.6nH" IND_0402_N 2285.43,2031.5 r90 top value=5.6nH
L11 "L 0402 500mA - 9.1nH" IND_0402_N 3814.57,2100.39 r0 top value=9.1nH
L12 "L 0402 500mA - 9.1nH" IND_0402_N 3698.82,2149.61 r0 top value=9.1nH
L13 "L 0402 310mA - 100nH" IND_0402_N 3828.74,226.38 r0 top value=100nH
L14 "L 0402 500mA - 9.1nH" IND_0402_N 4158.98,2090.71 r0 top value=9.1nH
L15 "L 0402 500mA - 9.1nH" IND_0402_N 4043.23,2139.92 r0 top value=9.1nH
L16 "L 0402 500mA - 9.1nH" IND_0402_N 2856.61,2064.88 r270 top value=9.1nH
L17 "L 0402 650mA - 5.6nH" IND_0402_N 2679.45,2035.35 r90 top value=5.6nH
L18 "L 0402 1.6A - 9.1nH" IND_0402_N 3848.43,354.33 r180 top value=9.1nH
L19 "L 0402 650mA - 5.6nH" IND_0402_N 2140.71,2910 r0 top value=5.6nH
MTG1 "Mounting Hole, 3MM" MTG-PTH-3MM 200,610 r180 bottom locked
MTG2 "Mounting Hole, 3MM" MTG-PTH-3MM 200,3120 r180 bottom locked
MTG3 "Mounting Hole, 3MM" MTG-PTH-3MM 1490,1095 r180 bottom locked
MTG4 "Mounting Hole, 3MM" MTG-PTH-3MM 3060,610 r180 bottom locked
MTG5 "Mounting Hole, 3MM" MTG-PTH-3MM 3060,3120 r0 top locked
MTG6 "Mounting Hole, 3MM" MTG-PTH-3MM 3700,610 r0 top locked
MTG7 "Mounting Hole, 3MM" MTG-PTH-3MM 3700,3120 r0 top locked
MTG8 "Mounting Hole, 3MM" MTG-PTH-3MM 6560,610 r0 top locked
MTG9 "Mounting Hole, 3MM" MTG-PTH-3MM 6560,3120 r0 top locked
MTG10 "Mounting Hole, 3MM" MTG-PTH-3MM 7200,610 r0 top locked
MTG11 "Mounting Hole, 3MM" MTG-PTH-3MM 10060,610 r0 top locked
MTG12 "Mounting Hole, 3MM" MTG-PTH-3MM 10060,3120 r0 top locked
MTG13 "Mounting Hole, 3MM" MTG-PTH-3MM 7200,3120 r0 top locked
Q1 "NTJD1155LT1G" ONSC-SC70-6-419B-02_W_V 3724.41,3677.4 r270 top
R1 "1 MOhms" "RES 0402_1005" 6977.36,3070 r0 top
R2 "100 kOhms" "RES 0402_1005" 6950,2447.36 r270 top
R3 "10 kOhms" "RES 0402_1005" 6867.36,2740 r0 top
R4 "24.9 kOhms" "RES 0402_1005" 6950,2550 r270 top
R5 "R 0402 1/10W 1% - 100R" RES_0402_N 1749.61,2909.45 r180 top value=100R
R6 "R 0402 1/10W 1% - 820R" RES_0402_N 1832.28,2909.45 r0 top value=820R
R7 "100 kOhms" "RES 0402_1005" 7922.64,2730 r0 top
R8 "100 kOhms" "RES 0402_1005" 8220,2730 r0 top
R9 "10 kOhms" "RES 0402_1005" 9360,1970 r270 top
R10 "10 kOhms" "RES 0402_1005" 9440,1970 r270 top
R15 "10 kOhms" "RES 0402_1005" 7870,1490 r180 top
R16 "10 kOhms" "RES 0402_1005" 8730,2047.36 r90 top
R17 "35.7 kOhms" "RES 0402_1005" 8097.36,2730 r0 top
R18 "10 kOhms" "RES 0402_1005" 3640,3647.36 r90 top
R19 "10 kOhms" "RES 0402_1005" 7870,1440 r0 top
R20 "100 Ohms" "RES 0402_1005" 4650,3480 r270 top
R21 "100 Ohms" "RES 0402_1005" 4540,3480 r270 top
R22 "10 kOhms" "RES 0402_1005" 7950,1662.64 r270 top
R23 "10 kOhms" "RES 0402_1005" 4650,3367.36 r270 top
R24 "10 kOhms" "RES 0402_1005" 4540,3367.36 r270 top
R25 "10 kOhms" "RES 0402_1005" 4440,3367.36 r270 top
R26 "10 kOhms" "RES 0402_1005" 4340,3367.36 r270 top
R27 "10 kOhms" "RES 0402_1005" 4240,3367.36 r270 top
R28 "12.4 kOhms" "RES 0402_1005" 7002.64,3810 r180 top
R29 "10 kOhms" "RES 0402_1005" 8480,2042.64 r270 top
R30 "100 Ohms" "RES 0402_1005" 7867.36,1640 r0 top
R31 "10 kOhms" "RES 0402_1005" 8531.08,2042.84 r90 top
R32 "2.2 kOhms" "RES 0402_1005" 7750,240 r90 top
R33 "10 kOhms" "RES 0402_1005" 9142.64,1490 r180 top
R34 "12.4 kOhms" "RES 0402_1005" 9290,2787.36 r270 top
R35 "100 kOhms" "RES 0402_1005" 9390,2787.36 r270 top
R36 "4.12 kOhms" "RES 0402_1005" 9340,2787.36 r90 top
R37 "100 kOhms" "RES 0402_1005" 6331,3195.36 r270 top
R38 "100 kOhms" "RES 0402_1005" 6897.36,3810 r180 top
R39 "10 kOhms" "RES 0402_1005" 7200,3802.64 r270 top
R40 "10 kOhms" "RES 0402_1005" 8610,2042.64 r90 top
R41 "10 kOhms" "RES 0402_1005" 7870,1380 r180 top
R42 "10 kOhms" "RES 0402_1005" 7870,1330 r0 top
R43 "10 kOhms" "RES 0402_1005" 7870,1270 r180 top
R44 "2.2 kOhms" "RES 0402_1005" 7870,1220 r0 top
R45 "100 Ohms" "RES 0402_1005" 4440,3480 r270 top
R46 "100 Ohms" "RES 0402_1005" 4340,3480 r270 top
R47 "100 Ohms" "RES 0402_1005" 4240,3480 r270 top
R48 "10 kOhms" "RES 0402_1005" 3750,3567.36 r90 top
R49 "R 0402 1/10W 1% - 5R6" RES_0402_N 1440,2910 r0 top value=5R6
R50 "R 0402 1/10W 1% - 866R" RES_0402_N 1370,2892.28 r90 top value=866R
R51 "R 0402 1/10W 1% - 866R" RES_0402_N 1510,2892.28 r90 top value=866R
R52 "R 0402 1/10W - 0R" RES_0402_N 2540,2850 r180 top value=0R
R53 "R 0402 1/10W - 0R" RES_0402_N 2200,2700 r90 top value=0R
R54 "R 0402 1/10W - 0R" RES_0402_N 2160,2700 r90 top value=0R
R55 "R 0402 1/10W - 0R" RES_0402_N 2511.81,2013.78 r270 top value=0R
R56 "R 0402 1/10W 1% - 10K" RES_0402_N 2120,2700 r270 top value=10K
R57 "R 0402 1/10W 1% - 10R" RES_0402_N 2413.39,2061.02 r270 top value=10R
R58 "R 0402 1/10W - 0R" RES_0402_N 2270,3170 r270 top value=0R
R59 "R 0402 1/10W - 0R" RES_0402_N 2480,3170 r270 top value=0R
R60 "R 0402 1/10W 1% - 10K" RES_0402_N 2327.72,2600 r0 top value=10K
R61 "R 0402 1/10W 1% - 10K" RES_0402_N 2327.72,2560 r0 top value=10K
R62 "R 0402 1/10W 1% - 10K" RES_0402_N 2400,2600 r180 top value=10K
R63 "R 0402 1/10W 1% - 10K" RES_0402_N 2400,2560 r180 top value=10K
R64 "R 0402 1/10W 1% - 10K" RES_0402_N 3400,2387.28 r90 top value=10K
R65 "R 0402 1/10W 1% - 10K" RES_0402_N 3440,2387.28 r90 top value=10K
R66 "R 0402 1/10W 1% - 10K" RES_0402_N 3480,2387.28 r90 top value=10K
R67 "R 0402 1/10W - 0R" RES_0402_N 3179.13,2174.8 r0 top value=0R
R68 "R 0402 1/10W - 0R" RES_0402_N 3177.17,1938.58 r0 top value=0R
R69 "R 0402 1/10W 1% - 10K" RES_0402_N 3297.24,1572.4 r270 top value=10K
R70 "R 0402 1/10W 1% - 10K" RES_0402_N 3346.46,1572.4 r270 top value=10K
R71 "R 0402 1/10W 1% - 10K" RES_0402_N 3395.67,1570.43 r270 top value=10K
R72 "R 0402 1/10W - 0R" RES_0402_N 3218.5,2751.97 r0 top value=0R
R73 "R 0402 1/10W - 0R" RES_0402_N 2383.86,2169.29 r0 top value=0R
R74 "R 0402 1/10W - 0R" RES_0402_N 3480,2492.91 r90 top value=0R
R75 "R 0402 1/10W - 0R" RES_0402_N 3297.24,1456.69 r90 top value=0R
R76 "R 0402 1/10W - 0R" RES_0402_N 3440,2492.91 r90 top value=0R
R77 "R 0402 1/10W - 0R" RES_0402_N 3346.46,1456.69 r90 top value=0R
R78 "R 0402 1/10W - 0R" RES_0402_N 3400,2492.91 r90 top value=0R
R79 "R 0402 1/10W - 0R" RES_0402_N 3395.67,1456.69 r90 top value=0R
R80 "R 0402 1/10W 1% - 5R6" RES_0402_N 2887.72,2910 r0 top value=5R6
R81 "R 0402 1/10W 1% - 5R6" RES_0402_N 3399.84,949.21 r270 top value=5R6
R82 "R 0402 1/10W 1% - 866R" RES_0402_N 2820,2892.28 r90 top value=866R
R83 "R 0402 1/10W 1% - 866R" RES_0402_N 2950,2892.28 r90 top value=866R
R84 "R 0402 1/10W 1% - 866R" RES_0402_N 3382.13,1013.78 r0 top value=866R
R85 "R 0402 1/10W 1% - 866R" RES_0402_N 3382.13,885.83 r0 top value=866R
R86 "R 0402 1/10W 1% - 270R" RES_0402_N 4520,967.72 r90 top value=270R
R87 "R 0402 1/10W 1% - 200R" RES_0402_N 4520,1127.72 r90 top value=200R
R88 "R 0805 1/2W 1% - 10R" RES_0805_N 4340,1374.45 r90 top value=10R
R89 "R 0805 1/2W 1% - 10R" RES_0805_N 4420,1374.45 r90 top value=10R
R90 "R 0402 1/10W 1% - 1K" RES_0402_N 4592.28,846.46 r180 top value=1K
R91 "R 0402 1/10W 1% - 1K" RES_0402_N 4727.72,846.46 r180 top value=1K
R92 "R 0805 1/2W 1% - 10R" RES_0805_N 4900,1374.45 r270 top value=10R
R93 "R 0805 1/2W 1% - 10R" RES_0805_N 4980,1374.45 r270 top value=10R
R94 "R 0402 1/10W 1% - 270R" RES_0402_N 4800,970 r90 top value=270R
R95 "R 0402 1/10W 1% - 200R" RES_0402_N 4800,1130 r90 top value=200R
R96 "R 0402 1/10W - 0R" RES_0402_N 2364.17,2110.24 r270 top value=0R
R97 "R 0402 1/10W - 0R" RES_0402_N 3307.09,2019.29 r270 top value=0R
R98 "R 0402 1/10W 1% - 10R" RES_0402_N 3208.66,2066.54 r270 top value=10R
R99 "R 0402 1/10W - 0R" RES_0402_N 2364.17,1992.13 r270 top value=0R
R100 "R 0402 1/10W - 0R" RES_0402_N 3159.45,2115.75 r270 top value=0R
R101 "R 0402 1/10W - 0R" RES_0402_N 3159.45,1997.64 r270 top value=0R
R102 "R 0402 1/10W 1% - 51R" RES_0402_N 2344.49,2051.18 r0 top value=51R
R103 "R 0402 1/10W - 0R" RES_0402_N 2905.83,2017.64 r270 top value=0R
R104 "R 0402 1/10W 1% - 10R" RES_0402_N 2807.4,2064.88 r270 top value=10R
R105 "R 0402 1/10W 1% - 51R" RES_0402_N 3139.76,2056.69 r0 top value=51R
R106 "R 0402 1/10W - 0R" RES_0402_N 3909.45,208.66 r90 top value=0R
R107 "R 0402 1/10W 1% - 10R" RES_0402_N 3828.74,187.01 r0 top value=10R
R108 "R 0402 1/10W 1% - 51R" RES_0402_N 3769.69,273.62 r0 top value=51R
R109 "R 0402 1/10W 1% - 51R" RES_0402_N 3895.67,273.62 r0 top value=51R
R110 "R 0402 1/10W - 0R" RES_0402_N 2758.19,2114.09 r270 top value=0R
R111 "R 0402 1/10W - 0R" RES_0402_N 2758.19,1995.98 r270 top value=0R
R112 "R 0402 1/10W - 0R" RES_0402_N 3795.28,2041.34 r270 top value=0R
R113 "R 0402 1/10W 1% - 51R" RES_0402_N 2738.5,2055.04 r0 top value=51R
R114 "R 0402 1/10W 1% - 51R" RES_0402_N 3828.74,291.34 r270 top value=51R
R115 "R 0402 1/10W - 0R" RES_0402_N 2381.89,1933.07 r0 top value=0R
R116 "0 Ohms" "RES 0402_1005" 8500,1077.36 r270 top
R117 "R 0402 1/10W 1% - 51R" RES_0402_N 3777.56,2149.61 r0 top value=51R
R118 "R 0402 1/10W 1% - 51R" RES_0402_N 3777.56,1933.07 r0 top value=51R
R119 "0 Ohms" "RES 0402_1005" 8550,1077.36 r270 top
R120 "0 Ohms" "RES 0402_1005" 8600,1077.36 r270 top
R121 "R 0402 1/10W - 0R" RES_0402_N 2777.87,2173.15 r0 top value=0R
R122 "R 0402 1/10W - 0R" RES_0402_N 4139.69,2031.65 r270 top value=0R
R123 "R 0402 1/10W 1% - 51R" RES_0402_N 4121.97,2139.92 r0 top value=51R
R124 "R 0402 1/10W 1% - 51R" RES_0402_N 4121.97,1923.39 r0 top value=51R
R125 "R 0402 1/10W - 0R" RES_0402_N 2440,3170 r270 top value=0R
R126 "R 0402 1/10W - 0R" RES_0402_N 2400,3170 r270 top value=0R
R127 "R 0402 1/10W - 0R" RES_0402_N 2350,3170 r270 top value=0R
R128 "R 0402 1/10W - 0R" RES_0402_N 2310,3170 r270 top value=0R
R129 "10 kOhms" "RES 0402_1005" 9142.64,1440 r180 top
R130 "100 kOhms" "RES 0402_1005" 6867.36,2680 r180 top
R131 "R 0402 1/10W - 0R" RES_0402_N 2775.91,1936.93 r0 top value=0R
R132 "R 0402 1/10W - 0R" RES_0402_N 3710.63,255.91 r270 top value=0R
R133 "R 0402 1/10W - 0R" RES_0402_N 3956.69,255.91 r270 top value=0R
T1 "SMD" TEST_POINT_SMD 7560,3710 r0 top
T4 "SMD" TEST_POINT_SMD 7560,3360 r0 top
TP1 "5018" 5018_KEYSTONE 1000,900 r90 top locked
TP2 "5018" 5018_KEYSTONE 4300,900 r90 top locked
TP3 "5018" 5018_KEYSTONE 9300,900 r90 top locked
U1 "LMR33630ADDAR" FP-DDA0008J-MFG 7100,2570 r270 top
U2 "TPS7A8300RGRT" FP-RGR0020A-MFG 9230,2960 r90 top
U3 "LMR33630ADDAR" FP-DDA0008J-MFG 8010,2900 r0 top
U4 "STM32L431RBT6" LQFP-64 8600,1600 r0 top locked
U5 "DBTC-10-4-75+" AT790-1 650,524.92 r270 top
U6 "AE427" SOT89 1790.94,3040.87 r90 top
U8 "LMR33630ADDAR" FP-DDA0008J-MFG 7026.3,3645 r180 top
U9 "TPS7A4700RGWR" FP-RGW0020A-MFG 6181.18,3125.51 r90 top
U10 "PE4312C-Z" QFN_20_PE4312 2379.94,2890 r0 top
U11 "AT24CS02-STUM-T" FP-C04-21344-MFG 9400,2200 r90 top
U12 "TC1.5-1+" AT1521 1000,2734.92 r270 top
U13 "PE42462A-X" 24_LFCSP(CP-24-8) 3390,2660.63 r0 top
U14 "PE42462A-X" 24_LFCSP(CP-24-8) 3390,1300 r180 top
U15 "TC1.5-1+" AT1521 3349.84,511.26 r270 top
U16 "TC1-1-13M+" AT1521 4660,628.5 r90 top
U17 "AE618" SOIC-8N_EP 4660,1090 r90 top
U18 "TC1-1-13M+" AT1521 4660,1620 r270 top
U19 "DBTC-10-4-75+" AT790-1 5520,424.92 r270 top
U22 "AS179-92LF" SC70_SOT-363 2140,420 r270 top
Y1 "24 MHz" "EPSON TSX-3225" 8200,1638.54 r90 top
Y2 "32.768 kHz" "ABRACON ABS06" 8230,1798.54 r90 top

## Footprints (in the part's own frame and the unit in brackets; to place one, negate y for a bottom-side part, rotate by r counter-clockwise, add the part's x,y. Pads: shape width x height; smd on the part's side, far side on the other; paste and mask are expansions set on the pad)
24_LFCSP(CP-24-8) [mm] "W:4 L:4 P:0.5mm"
  rrect20% 0.75x0.25 smd: 1(-1.975,1.25) 2(-1.975,0.75) 3(-1.975,0.25) 4(-1.975,-0.25) 5(-1.975,-0.75) 6(-1.975,-1.25) 13(1.975,-1.25) 14(1.975,-0.75) 15(1.975,-0.25) 16(1.975,0.25) 17(1.975,0.75) 18(1.975,1.25)
  rrect20% 0.25x0.75 smd: 7(-1.25,-1.975) 8(-0.75,-1.975) 9(-0.25,-1.975) 10(0.25,-1.975) 11(0.75,-1.975) 12(1.25,-1.975) 19(1.25,1.975) 20(0.75,1.975) 21(0.25,1.975) 22(-0.25,1.975) 23(-0.75,1.975) 24(-1.25,1.975)
  rrect20% 2.7x2.7 smd: 25(0,0)
  silkscreen extent -2.97,-2.2 2.2,2.2, body extent -2.06,-2.06 2.06,2.06, height 0.8
1211-66137 [mm] "W: L:"
  rrect10% 2.1x3.8 smd mask+0.05: 1(0,0)
  rect 1.7x3.8 smd far side mask+0.05: 2(-3.9,0) 2(3.9,0)
  rect 1.7x3.8 smd mask+0.05: 2(-3.9,0) 2(3.9,0)
  body extent -4.75,-1.8 4.75,22.4, height 5.1
5018_KEYSTONE [mm] "W:2.8 L:3.8 mm"
  rrect25% 2.4x3 smd mask+0.102: 1(-1.2,0) 1(1.2,0)
  body extent -2.45,-1.22 2.49,1.12, height 2.29
2337019-1 [mm] "W:3 L:3.2 mm"
  rrect50% 1x1.05 smd: 1(0,-1.525)
  rrect50% 1.05x2.2 smd: G1(-1.475,0) G2(1.475,0)
  Keep-Out Layer region: 0.875,-0.9 -0.875,-0.9 -0.875,1.1 0.875,1.1
  silkscreen extent -0.1,-2.7 0.1,-2.5, body extent -1.5,-1.55 1.5,1.55, height 1.25
"ABRACON ABS06" [mm] "Crystal, 2-Leads, Body 1.20x2.00mm, Pitch 1.50mm, IPC Medium Density"
  rect 0.75x1.4 smd: 1(-0.725,0) 2(0.725,0)
  silkscreen extent -1.4,-1 1.4,1, body extent -1.02,-0.62 1.03,0.63, height 0.6
AT790-1 [mm] "W:3,81 L:3,81mm P:1,27mm"
  rrect20% 1.27x0.76 smd: 1(1.395,1.27) 2(1.395,0) 3(1.395,-1.27) 4(-1.395,-1.27) 6(-1.395,1.27)
  silkscreen extent -2.39,-1.98 1.98,2.04, body extent -1.91,-1.91 1.91,1.91, height 3.81
AT1521 [mm] "W:3,81 L:3,81mm P:1,27mm"
  rrect20% 1.27x0.76 smd: 1(1.395,1.27) 2(1.395,0) 3(1.395,-1.27) 4(-1.395,-1.27) 6(-1.395,1.27)
  silkscreen extent -2.39,-1.98 1.98,2.04, body extent -1.91,-1.91 1.91,1.91, height 4.06
"CAP 0402_1005" [mm] "Chip Capacitor, 2-Leads, Body 1.02x0.51mm, IPC Medium Density"
  rect 0.6x0.64 smd: 1(-0.44,0) 2(0.44,0)
  silkscreen extent -1,-0.5 1,0.5, body extent -0.5,-0.26 0.5,0.26, height 0.52
"CAP 0805_2012" [mm] "Chip Capacitor, 2-Leads, Body 2.00x1.20mm, IPC Medium Density"
  rect 1.3x1.4 smd: 1(-0.8,0) 2(0.8,0)
  silkscreen extent -1.7,-0.9 1.7,0.9, body extent -1,-0.64 1,0.64, height 1.26
"CAP 1206_3216 - 0.8MM" [mm] "Chip Capacitor, 2-Leads, Body 3.25x1.60mm, IPC Medium Density"
  rect 1.3x1.8 smd: 1(-1.45,0) 2(1.45,0)
  silkscreen extent -2.37,-1.12 2.37,1.12, body extent -1.6,-0.8 1.6,0.8, height 0.8
CAP_0402_N [mm] "W:1 L:0.50 P:0.92mm IPC Medium Density"
  rrect20% 0.64x0.64 smd: 1(-0.46,0) 2(0.46,0)
  body extent -0.55,-0.3 0.55,0.3, height 0.6
CAP_0603_N [mm] "W:0.8 L:1.6 P:1.55mm IPC Medium Density"
  rrect20% 0.95x1 smd: 1(-0.775,0) 2(0.775,0)
  body extent -0.9,-0.5 0.9,0.5, height 1
"CUI PJ-002BH-SMT-TR" [mm]
  rect 2.8x2.8 smd: 1(-2.25,5.5) 1(3.85,5.5) 2(-2.25,-5.5) 3(3.85,-5.5)
  round 0 hole 1.7 unplated: M(-2.25,0)
  round 0 hole 1.8 unplated: M(2.25,0)
  silkscreen extent -7.25,-4.5 7.55,4.5, body extent -7.25,-6.3 7.55,6.3, height 11.4
"DIODES INC SDT10A45P5" [mm] "PowerDI5"
  rect 4.86x3.36 smd: 1(-1.12,0)
  rect 1.4x1.39 smd: 2(2.862,-0.92) 2(2.862,0.92)
  silkscreen extent -3.35,-2.05 2.7,2, body extent -3.25,-1.98 3.25,1.98, height 1.1
"EPSON TSX-3225" [mm] "Crystal, 4-Leads, Body 2.50x3.20mm, Pitch 2.20mm, IPC Medium Density"
  rect 1.4x1.15 smd: 1(-1.1,-0.8) 2(1.1,-0.8) 3(1.1,0.8) 4(-1.1,0.8)
  silkscreen extent -2.25,-1.85 2.1,1.7, body extent -1.61,-1.26 1.61,1.26, height 0.6
"FER 0603_1608" [mm] "Chip Ferrite, 2-Leads, Body 1.60x0.80mm, IPC Medium Density"
  rect 0.9x1 smd: 1(-0.675,0) 2(0.675,0)
  silkscreen extent -1.4,-0.7 1.4,0.7, body extent -0.8,-0.41 0.8,0.41, height 0.82
FP-0451-MFG [mil]
  rect 77x124 smd paste+0 mask+0: 1(-96.5,0) 2(96.5,0)
  silkscreen extent -43,-58 43,58, body extent -120,-53 120,53, height 116
FP-3034-MFG [mm]
  rect 3.96x3.96 smd paste-1000 mask+0: 1(0,-0.67)
  rect 1.27x5.08 smd paste+0 mask+0: 2(-10.985,-0.67) 2(10.985,-0.67)
  silkscreen extent -10.73,-8.19 10.73,8.19, body extent -11.72,-8.28 11.72,8.28, height 0.25
FP-90130-1214-MFG [mm]
  rect 1.55x1.55 hole 1 paste-2539.97 mask+0: 1(-7.62,1.265)
  round 1.55 hole 1 paste-2539.97 mask+0: 2(-7.62,-1.275) 3(-5.08,1.265) 4(-5.08,-1.275) 5(-2.54,1.265) 6(-2.54,-1.275) 7(0,1.265) 8(0,-1.275) 9(2.54,1.265) 10(2.54,-1.275) 11(5.08,1.265) 12(5.08,-1.275) 13(7.62,1.265) 14(7.62,-1.275)
  silkscreen extent -10.88,-5.02 10.16,5.02, body extent -10.06,-4.87 10.06,4.87, height 11.1
FP-C04-21344-MFG [mm]
  rect 1.05x0.6 smd paste+0 mask+0: 1(-1.3,0.95) 2(-1.3,0) 3(-1.3,-0.95) 4(1.3,-0.95) 5(1.3,0.95)
  silkscreen extent -2.52,-1.55 0.87,1.55, body extent -1.92,-1.9 1.92,1.9, height 0.25
FP-DDA0008J-MFG [mm]
  rect 1.55x0.6 smd paste+0 mask+0: 1(-2.7,1.905) 2(-2.7,0.635) 3(-2.7,-0.635) 4(-2.7,-1.905) 5(2.7,-1.905) 6(2.7,-0.635) 7(2.7,0.635) 8(2.7,1.905)
  rect 2.95x4.9 smd paste-1000 mask-1000: 9(0,0)
  silkscreen extent -4.22,-2.83 2,2.83, body extent -3.57,-2.75 3.57,2.75, height 0.25
FP-FTSH-105-01-F-DV-K-P-T-MFG [mm]
  rect 0.74x2.79 smd paste+0 mask+0: 1(-2.54,-2.035) 2(-2.54,2.035) 3(-1.27,-2.035) 4(-1.27,2.035) 5(0,-2.035) 6(0,2.035) 7(1.27,-2.035) 8(1.27,2.035) 9(2.54,-2.035) 10(2.54,2.035)
  silkscreen extent -3.24,-4.14 3.24,0.27, body extent -3.17,-2.92 3.17,2.92, height 6.38
FP-RGR0020A-MFG [mm]
  round 0.252 smd paste-1000 mask+0: 1(-1.725,1) 2(-1.725,0.5) 3(-2.01,0) 4(-2.01,-0.5) 5(-2.01,-1) 6(-1,-1.725) 7(-0.5,-1.725) 8(0,-2.01) 9(0.5,-2.01) 10(1,-1.725) 11(1.725,-1) 12(1.725,-0.5) 13(2,0) 14(2,0.5) 15(1.725,1) 16(1,1.725) 17(0.5,1.725) 18(0,2) 19(-0.5,2) 20(-1,2)
  rect 2.05x2.05 smd paste-1000 mask+0: 21(0,0)
  Top Layer region: -0.14,-2.15 -0.14,-1.44 -0.129,-1.386 -0.099,-1.341 -0.054,-1.311 0,-1.3 0,-1.3 0.054,-1.311 0.099,-1.341 0.129,-1.386 0.14,-1.44 0.14,-1.44 0.14,-2.15
  Top Layer region: 0.14,2.15 0.14,1.44 0.129,1.386 0.099,1.341 0.054,1.311 0,1.3 0,1.3 -0.054,1.311 -0.099,1.341 -0.129,1.386 -0.14,1.44 -0.14,1.44 -0.14,2.15
  Top Layer region: -0.86,2.15 -0.86,1.44 -0.871,1.386 -0.901,1.341 -0.946,1.311 -1,1.3 -1,1.3 -1.054,1.311 -1.099,1.341 -1.129,1.386 -1.14,1.44 -1.14,1.44 -1.14,2.15
  Top Layer region: -0.36,2.15 -0.36,1.44 -0.371,1.386 -0.401,1.341 -0.446,1.311 -0.5,1.3 -0.5,1.3 -0.554,1.311 -0.599,1.341 -0.629,1.386 -0.64,1.44 -0.64,1.44 -0.64,2.15
  Top Layer region: 0.64,2.15 0.64,1.44 0.629,1.386 0.599,1.341 0.554,1.311 0.5,1.3 0.5,1.3 0.446,1.311 0.401,1.341 0.371,1.386 0.36,1.44 0.36,1.44 0.36,2.15
  Top Layer region: 1.14,2.15 1.14,1.44 1.129,1.386 1.099,1.341 1.054,1.311 1,1.3 1,1.3 0.946,1.311 0.901,1.341 0.871,1.386 0.86,1.44 0.86,1.44 0.86,2.15
  Top Layer region: 2.15,0.86 1.44,0.86 1.386,0.871 1.341,0.901 1.311,0.946 1.3,1 1.3,1 1.311,1.054 1.341,1.099 1.386,1.129 1.44,1.14 1.44,1.14 2.15,1.14
  Top Layer region: 2.15,0.36 1.44,0.36 1.386,0.371 1.341,0.401 1.311,0.446 1.3,0.5 1.3,0.5 1.311,0.554 1.341,0.599 1.386,0.629 1.44,0.64 1.44,0.64 2.15,0.64
  Top Layer region: 2.15,-0.14 1.44,-0.14 1.386,-0.129 1.341,-0.099 1.311,-0.054 1.3,0 1.3,0 1.311,0.054 1.341,0.099 1.386,0.129 1.44,0.14 1.44,0.14 2.15,0.14
  Top Layer region: 2.15,-0.64 1.44,-0.64 1.386,-0.629 1.341,-0.599 1.311,-0.554 1.3,-0.5 1.3,-0.5 1.311,-0.446 1.341,-0.401 1.386,-0.371 1.44,-0.36 1.44,-0.36 2.15,-0.36
  Top Layer region: 2.15,-1.14 1.44,-1.14 1.386,-1.129 1.341,-1.099 1.311,-1.054 1.3,-1 1.3,-1 1.311,-0.946 1.341,-0.901 1.386,-0.871 1.44,-0.86 1.44,-0.86 2.15,-0.86
  Top Layer region: 0.86,-2.15 0.86,-1.44 0.871,-1.386 0.901,-1.341 0.946,-1.311 1,-1.3 1,-1.3 1.054,-1.311 1.099,-1.341 1.129,-1.386 1.14,-1.44 1.14,-1.44 1.14,-2.15
  Top Layer region: 0.36,-2.15 0.36,-1.44 0.371,-1.386 0.401,-1.341 0.446,-1.311 0.5,-1.3 0.5,-1.3 0.554,-1.311 0.599,-1.341 0.629,-1.386 0.64,-1.44 0.64,-1.44 0.64,-2.15
  Top Layer region: -0.64,-2.15 -0.64,-1.44 -0.629,-1.386 -0.599,-1.341 -0.554,-1.311 -0.5,-1.3 -0.5,-1.3 -0.446,-1.311 -0.401,-1.341 -0.371,-1.386 -0.36,-1.44 -0.36,-1.44 -0.36,-2.15
  Top Layer region: -1.14,-2.15 -1.14,-1.44 -1.129,-1.386 -1.099,-1.341 -1.054,-1.311 -1,-1.3 -1,-1.3 -0.946,-1.311 -0.901,-1.341 -0.871,-1.386 -0.86,-1.44 -0.86,-1.44 -0.86,-2.15
  Top Layer region: -2.15,-0.86 -1.44,-0.86 -1.386,-0.871 -1.341,-0.901 -1.311,-0.946 -1.3,-1 -1.3,-1 -1.311,-1.054 -1.341,-1.099 -1.386,-1.129 -1.44,-1.14 -1.44,-1.14 -2.15,-1.14
  Top Layer region: -2.15,-0.36 -1.44,-0.36 -1.386,-0.371 -1.341,-0.401 -1.311,-0.446 -1.3,-0.5 -1.3,-0.5 -1.311,-0.554 -1.341,-0.599 -1.386,-0.629 -1.44,-0.64 -1.44,-0.64 -2.15,-0.64
  Top Layer region: -2.15,0.14 -1.44,0.14 -1.386,0.129 -1.341,0.099 -1.311,0.054 -1.3,0 -1.3,0 -1.311,-0.054 -1.341,-0.099 -1.386,-0.129 -1.44,-0.14 -1.44,-0.14 -2.15,-0.14
  Top Layer region: -2.15,0.64 -1.44,0.64 -1.386,0.629 -1.341,0.599 -1.311,0.554 -1.3,0.5 -1.3,0.5 -1.311,0.446 -1.341,0.401 -1.386,0.371 -1.44,0.36 -1.44,0.36 -2.15,0.36
  Top Layer region: -2.15,1.14 -1.44,1.14 -1.386,1.129 -1.341,1.099 -1.311,1.054 -1.3,1 -1.3,1 -1.311,0.946 -1.341,0.901 -1.386,0.871 -1.44,0.86 -1.44,0.86 -2.15,0.86
  silkscreen extent -2.85,-1.83 1.83,1.83, body extent -2.25,-2.25 2.25,2.25, height 0.25
FP-RGW0020A-MFG [mm]
  round 0.315 smd paste-1000 mask+0: 1(-2.418,1.3) 2(-2.4,0.65) 3(-2.418,0) 4(-2.4,-0.65) 5(-2.4,-1.3) 6(-1.3,-2.418) 7(-0.65,-2.4) 8(0,-2.418) 9(0.65,-2.4) 10(1.3,-2.4) 11(2.418,-1.3) 12(2.4,-0.65) 13(2.418,0) 14(2.4,0.65) 15(2.4,1.3) 16(1.3,2.418) 17(0.65,2.4) 18(0,2.418) 19(-0.65,2.4) 20(-1.3,2.4)
  rect 3.15x3.15 smd paste-1000 mask+0: 21(0,0)
  Top Layer region: 2.9,-1.475 2.075,-1.475 2.008,-1.462 1.951,-1.424 1.913,-1.367 1.9,-1.3 1.9,-1.3 1.913,-1.233 1.951,-1.176 2.008,-1.138 2.075,-1.125 2.075,-1.125 2.9,-1.125
  Top Layer region: -0.825,-2.9 -0.825,-2.075 -0.812,-2.008 -0.774,-1.951 -0.717,-1.913 -0.65,-1.9 -0.65,-1.9 -0.583,-1.913 -0.526,-1.951 -0.488,-2.008 -0.475,-2.075 -0.475,-2.075 -0.475,-2.9
  Top Layer region: -2.9,-1.125 -2.075,-1.125 -2.008,-1.138 -1.951,-1.176 -1.913,-1.233 -1.9,-1.3 -1.9,-1.3 -1.913,-1.367 -1.951,-1.424 -2.008,-1.462 -2.075,-1.475 -2.075,-1.475 -2.9,-1.475
  Top Layer region: -1.125,2.9 -1.125,2.075 -1.138,2.008 -1.176,1.951 -1.233,1.913 -1.3,1.9 -1.3,1.9 -1.367,1.913 -1.424,1.951 -1.462,2.008 -1.475,2.075 -1.475,2.075 -1.475,2.9
  Top Layer region: -0.475,2.9 -0.475,2.075 -0.488,2.008 -0.526,1.951 -0.583,1.913 -0.65,1.9 -0.65,1.9 -0.717,1.913 -0.774,1.951 -0.812,2.008 -0.825,2.075 -0.825,2.075 -0.825,2.9
  Top Layer region: 0.175,2.9 0.175,2.075 0.162,2.008 0.124,1.951 0.067,1.913 0,1.9 0,1.9 -0.067,1.913 -0.124,1.951 -0.162,2.008 -0.175,2.075 -0.175,2.075 -0.175,2.9
  Top Layer region: 0.825,2.9 0.825,2.075 0.812,2.008 0.774,1.951 0.717,1.913 0.65,1.9 0.65,1.9 0.583,1.913 0.526,1.951 0.488,2.008 0.475,2.075 0.475,2.075 0.475,2.9
  Top Layer region: 1.475,2.9 1.475,2.075 1.462,2.008 1.424,1.951 1.367,1.913 1.3,1.9 1.3,1.9 1.233,1.913 1.176,1.951 1.138,2.008 1.125,2.075 1.125,2.075 1.125,2.9
  Top Layer region: 1.125,-2.9 1.125,-2.075 1.138,-2.008 1.176,-1.951 1.233,-1.913 1.3,-1.9 1.3,-1.9 1.367,-1.913 1.424,-1.951 1.462,-2.008 1.475,-2.075 1.475,-2.075 1.475,-2.9
  Top Layer region: 0.475,-2.9 0.475,-2.075 0.488,-2.008 0.526,-1.951 0.583,-1.913 0.65,-1.9 0.65,-1.9 0.717,-1.913 0.774,-1.951 0.812,-2.008 0.825,-2.075 0.825,-2.075 0.825,-2.9
  Top Layer region: -0.175,-2.9 -0.175,-2.075 -0.162,-2.008 -0.124,-1.951 -0.067,-1.913 0,-1.9 0,-1.9 0.067,-1.913 0.124,-1.951 0.162,-2.008 0.175,-2.075 0.175,-2.075 0.175,-2.9
  Top Layer region: -1.475,-2.9 -1.475,-2.075 -1.462,-2.008 -1.424,-1.951 -1.367,-1.913 -1.3,-1.9 -1.3,-1.9 -1.233,-1.913 -1.176,-1.951 -1.138,-2.008 -1.125,-2.075 -1.125,-2.075 -1.125,-2.9
  Top Layer region: 2.9,1.125 2.075,1.125 2.008,1.138 1.951,1.176 1.913,1.233 1.9,1.3 1.9,1.3 1.913,1.367 1.951,1.424 2.008,1.462 2.075,1.475 2.075,1.475 2.9,1.475
  Top Layer region: 2.9,0.475 2.075,0.475 2.008,0.488 1.951,0.526 1.913,0.583 1.9,0.65 1.9,0.65 1.913,0.717 1.951,0.774 2.008,0.812 2.075,0.825 2.075,0.825 2.9,0.825
  Top Layer region: 2.9,-0.175 2.075,-0.175 2.008,-0.162 1.951,-0.124 1.913,-0.067 1.9,0 1.9,0 1.913,0.067 1.951,0.124 2.008,0.162 2.075,0.175 2.075,0.175 2.9,0.175
  Top Layer region: 2.9,-0.825 2.075,-0.825 2.008,-0.812 1.951,-0.774 1.913,-0.717 1.9,-0.65 1.9,-0.65 1.913,-0.583 1.951,-0.526 2.008,-0.488 2.075,-0.475 2.075,-0.475 2.9,-0.475
  Top Layer region: -2.9,-0.475 -2.075,-0.475 -2.008,-0.488 -1.951,-0.526 -1.913,-0.583 -1.9,-0.65 -1.9,-0.65 -1.913,-0.717 -1.951,-0.774 -2.008,-0.812 -2.075,-0.825 -2.075,-0.825 -2.9,-0.825
  Top Layer region: -2.9,0.175 -2.075,0.175 -2.008,0.162 -1.951,0.124 -1.913,0.067 -1.9,0 -1.9,0 -1.913,-0.067 -1.951,-0.124 -2.008,-0.162 -2.075,-0.175 -2.075,-0.175 -2.9,-0.175
  Top Layer region: -2.9,0.825 -2.075,0.825 -2.008,0.812 -1.951,0.774 -1.913,0.717 -1.9,0.65 -1.9,0.65 -1.913,0.583 -1.951,0.526 -2.008,0.488 -2.075,0.475 -2.075,0.475 -2.9,0.475
  Top Layer region: -2.9,1.475 -2.075,1.475 -2.008,1.462 -1.951,1.424 -1.913,1.367 -1.9,1.3 -1.9,1.3 -1.913,1.233 -1.951,1.176 -2.008,1.138 -2.075,1.125 -2.075,1.125 -2.9,1.125
  silkscreen extent -3.6,-2.58 2.58,2.58, body extent -3,-3 3,3, height 0.25
FP-SESD0402-MFG [mm]
  rect 0.35x0.6 smd paste+0 mask+0: 1(-0.325,0) 2(0.325,0)
  silkscreen extent -0.53,-0.71 0.53,0.7, body extent -0.5,-0.3 0.5,0.3, height 0.43
FP-SMBJ-MFG [mm]
  rect 2.5x2.3 smd paste+0 mask+0: 1(-2.15,0) 2(2.15,0)
  silkscreen extent -4.1,-1.97 2.3,1.97, body extent -3.5,-2.07 3.5,2.07, height 0.25
"HARWIN M20-9740745" [mm] "2.54mm DIL PC TAIL PIN HEADER ASSEMBLY"
  round 2 hole 1.1: 1(-7.62,1.27) 2(-5.08,1.27) 3(-2.54,1.27) 4(0,1.27) 5(2.54,1.27) 6(5.08,1.27) 7(7.62,1.27) 8(7.62,-1.27) 9(5.08,-1.27) 10(2.54,-1.27) 11(0,-1.27) 12(-2.54,-1.27) 13(-5.08,-1.27) 14(-7.62,-1.27)
  silkscreen extent -9,-5.59 8.98,2.57, body extent -8.89,-10.97 8.89,1.59, height 5
HIROSE_MS-156C3 [mm]
  rect 0.48x0.5 smd paste-1 mask+0: A(0.96,0) C(-0.96,0)
  rect 1x0.3 smd paste-1 mask+0: G1(0,0.79) G2(0,-0.79)
  Top Layer region: 1.2,0.58 -0.9,0.58 -1.2,0.88 -1.2,1.25 -0.45,1.25 -0.45,1 0.45,1 0.45,1.25 1.2,1.25
  Top Layer region: 1.2,-1.25 0.45,-1.25 0.45,-1 -0.45,-1 -0.45,-1.25 -1.2,-1.25 -1.2,-0.88 -0.9,-0.58 1.2,-0.58
  Top Layer keep-out region: -0.973,0.446 1.2,0.446 1.2,0.4 0.6,0.4 0.6,-0.4 1.2,-0.4 1.2,-0.445 -0.96,-0.445 -1.2,-0.685 -1.2,-0.4 -0.6,-0.4 -0.6,0.4 -1.2,0.4 -1.2,0.673
  silkscreen extent -1.85,1.15 -1.65,1.35, body extent -1.2,-1.15 1.1,1.15, height 1.31
IND_0402_N [mm] "W:1 L:0.50 P:0.98mm IPC Medium Density"
  rrect20% 0.58x0.64 smd: 1(-0.49,0) 2(0.49,0)
  body extent -0.55,-0.3 0.55,0.3, height 0.6
IND_0806_LQH2MPN820MGRL [mm] "W:1.6 l:2 P:1.7"
  rrect10% 0.9x1 smd mask+0.102: 1(-0.85,0) 2(0.85,0)
  silkscreen extent -1.05,-0.85 1.05,0.85, body extent -1.1,-0.8 1.1,0.8, height 1.05
IND_1008_N [mm] "W:2.65 L:2.57 P:2.15mm IPC Medium Density"
  rrect15% 1x2.5 smd: 1(-1.075,0) 2(1.075,0)
  silkscreen extent -0.25,-1.16 0.25,1.16, body extent -1.31,-1.22 1.31,1.22, height 2.03
"LED 0603_1608 GREEN" [mm] "Chip Diode, 2-Leads, Body 1.60x0.80mm, IPC Medium Density"
  rect 0.8x0.8 smd: 1(-0.75,0) 2(0.75,0)
  silkscreen extent -1.52,-0.7 1.52,0.7, body extent -0.8,-0.4 0.8,0.4, height 0.53